# Altium PCB Pedal_Filters_45.PcbDoc (part 1 of 4)
Units mil, origin at the board's own origin, x right, y up, seen from the top; angles counter-clockwise.
Board outline 4875 x 3407.56 mil, 4 copper layers (Top Layer, Layer 1, Layer 2, Bottom Layer); 245 components, 181 nets, 874 pads, 470 vias.
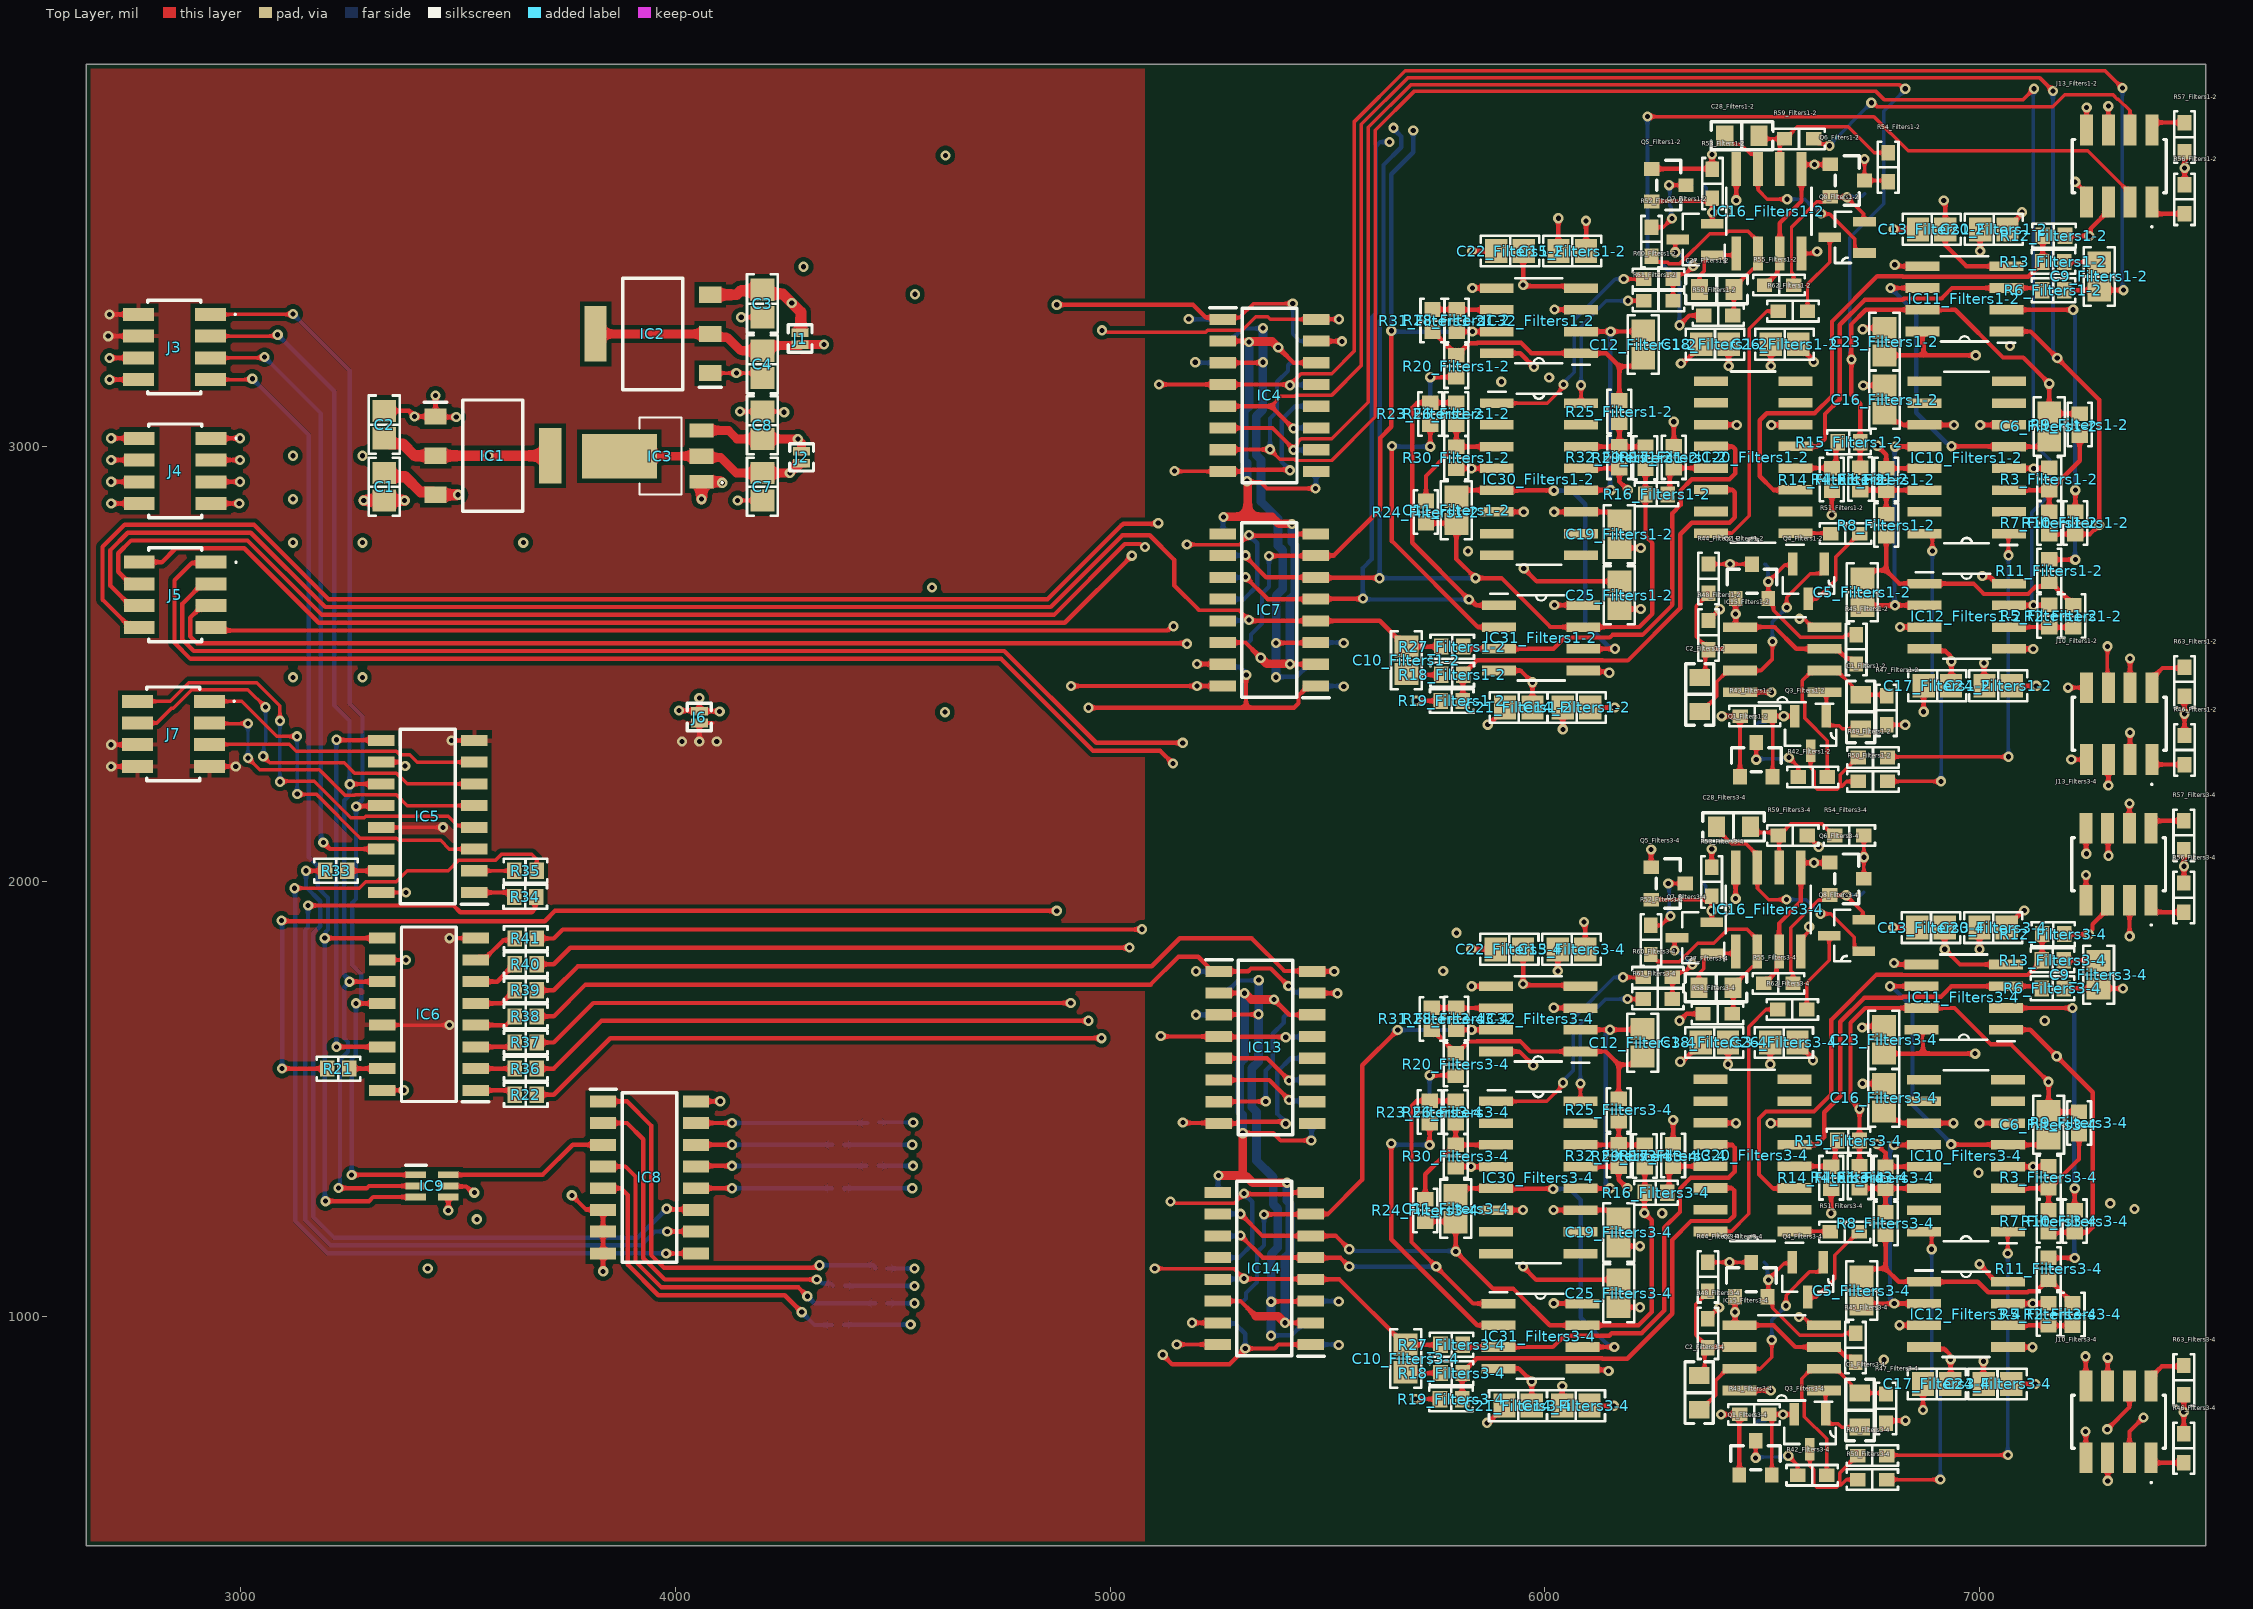
[diagram p0: Top Layer view]
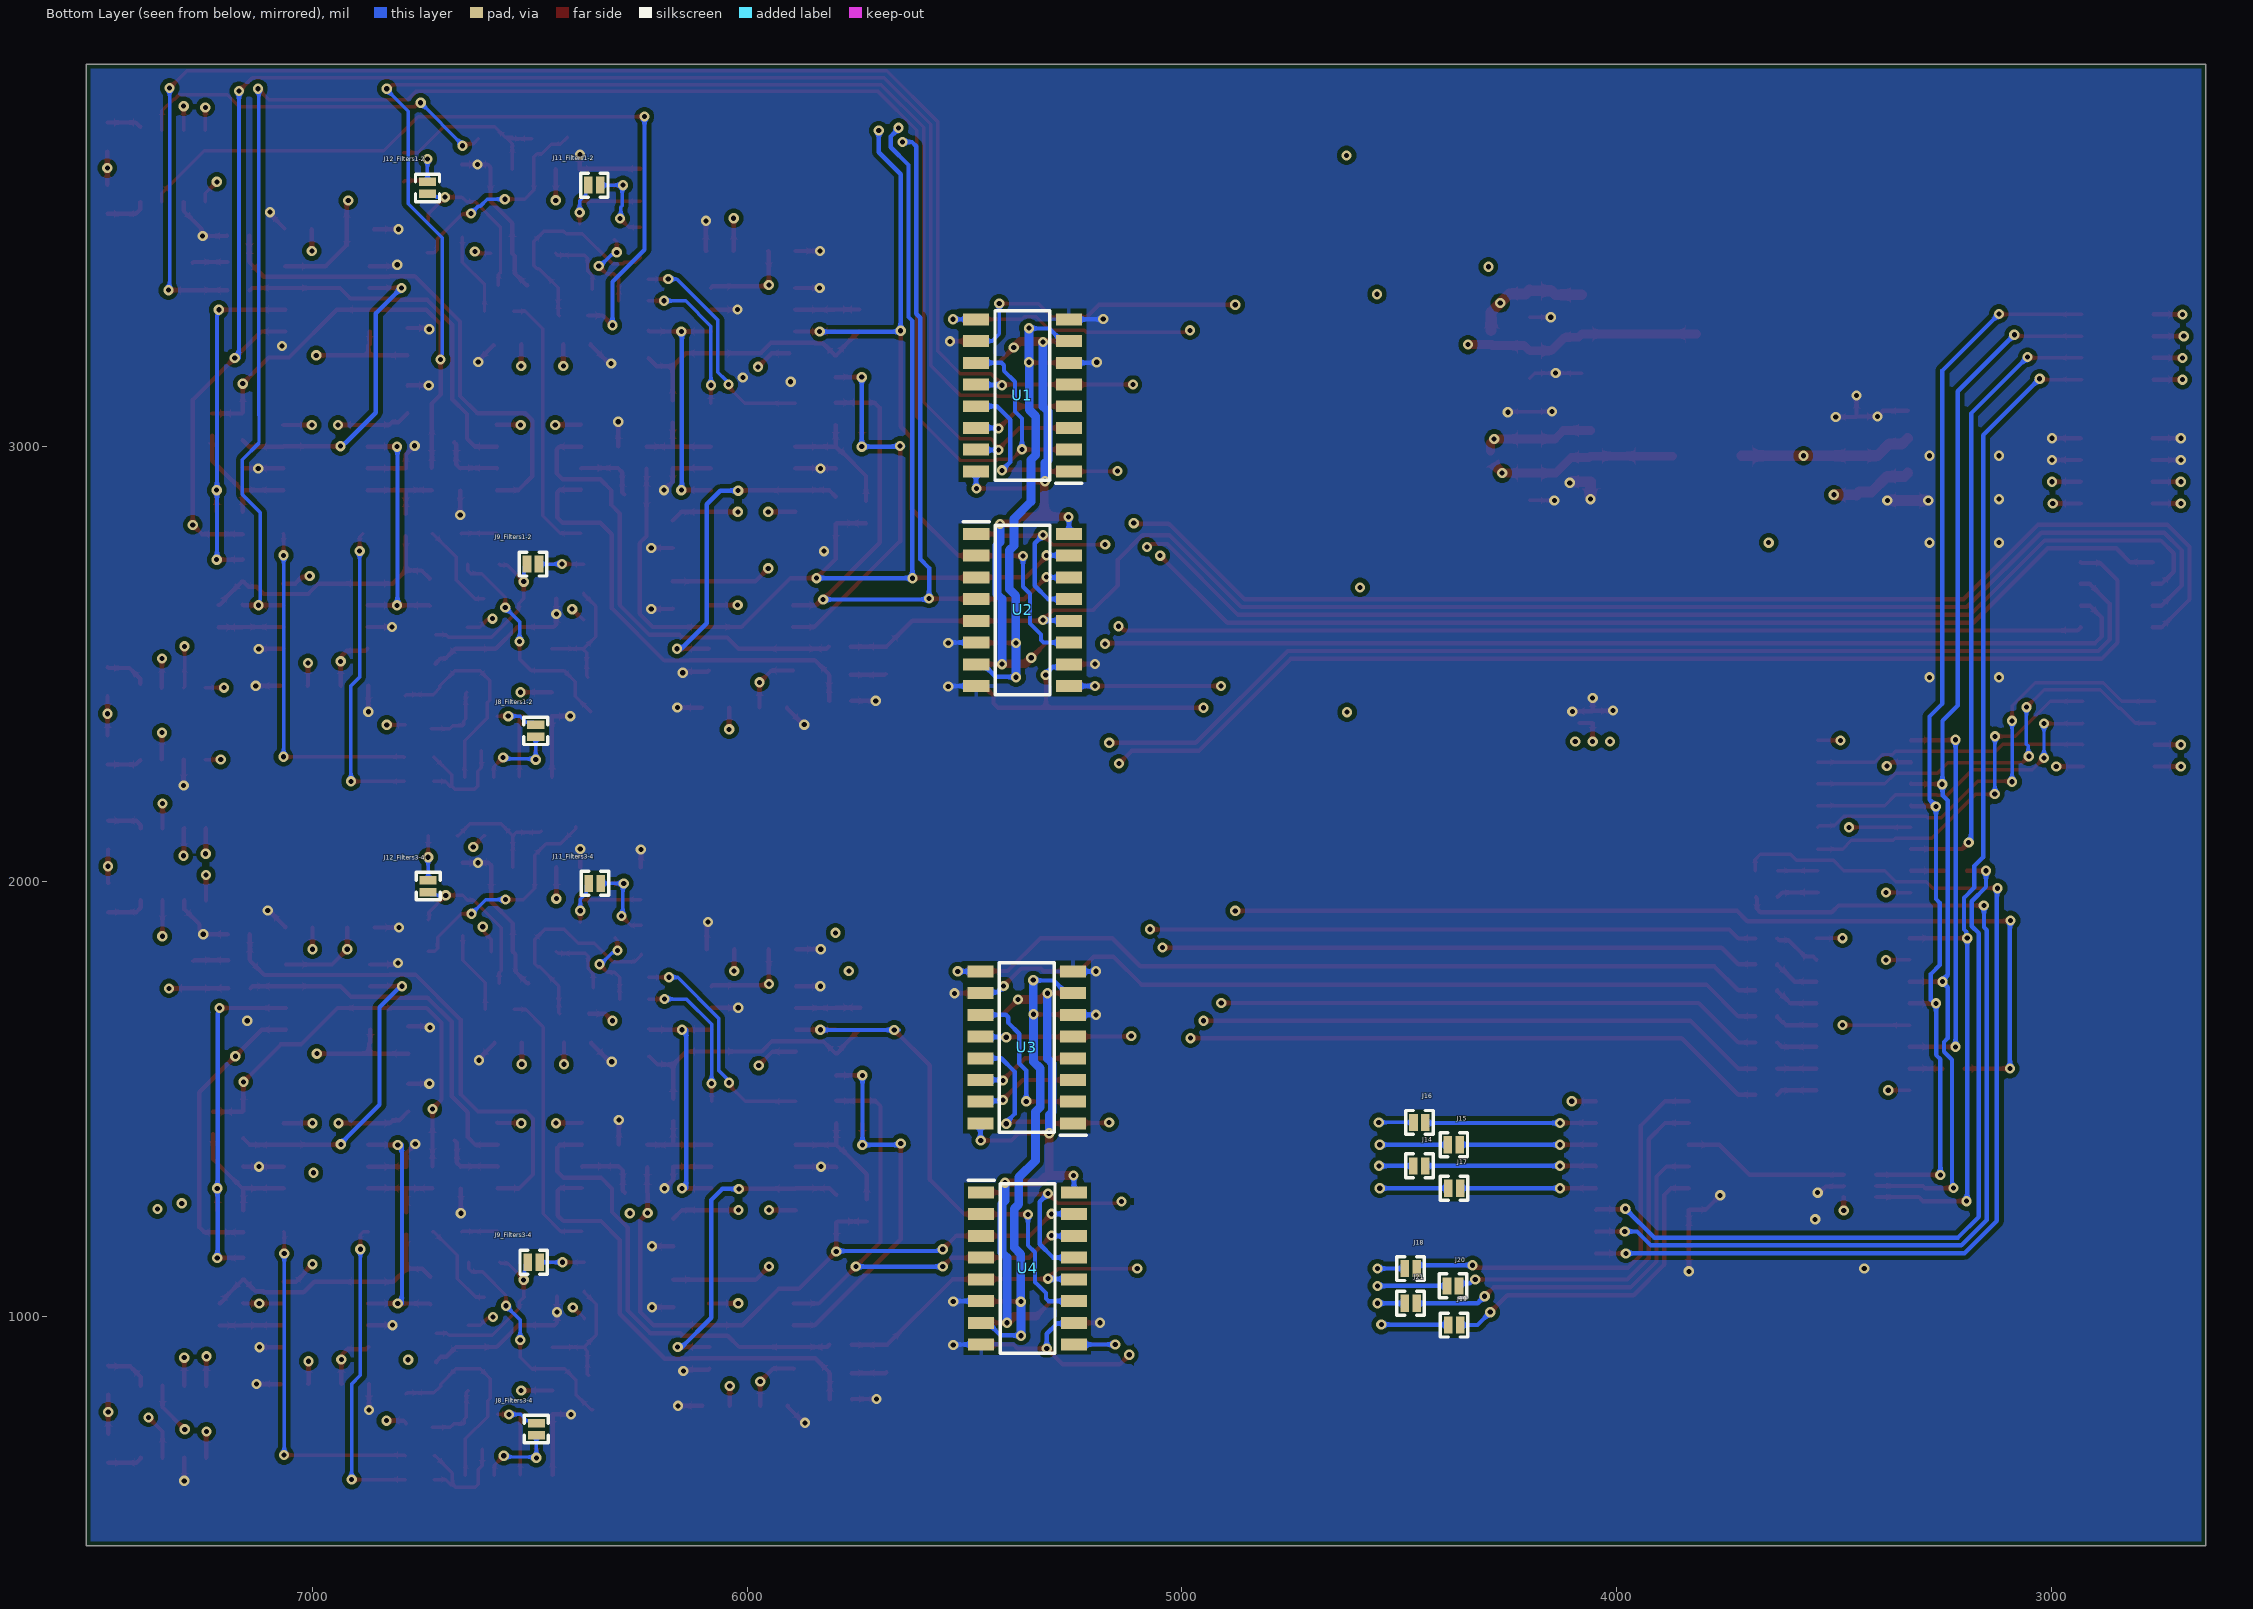
[diagram p1: Bottom Layer view, seen from below]
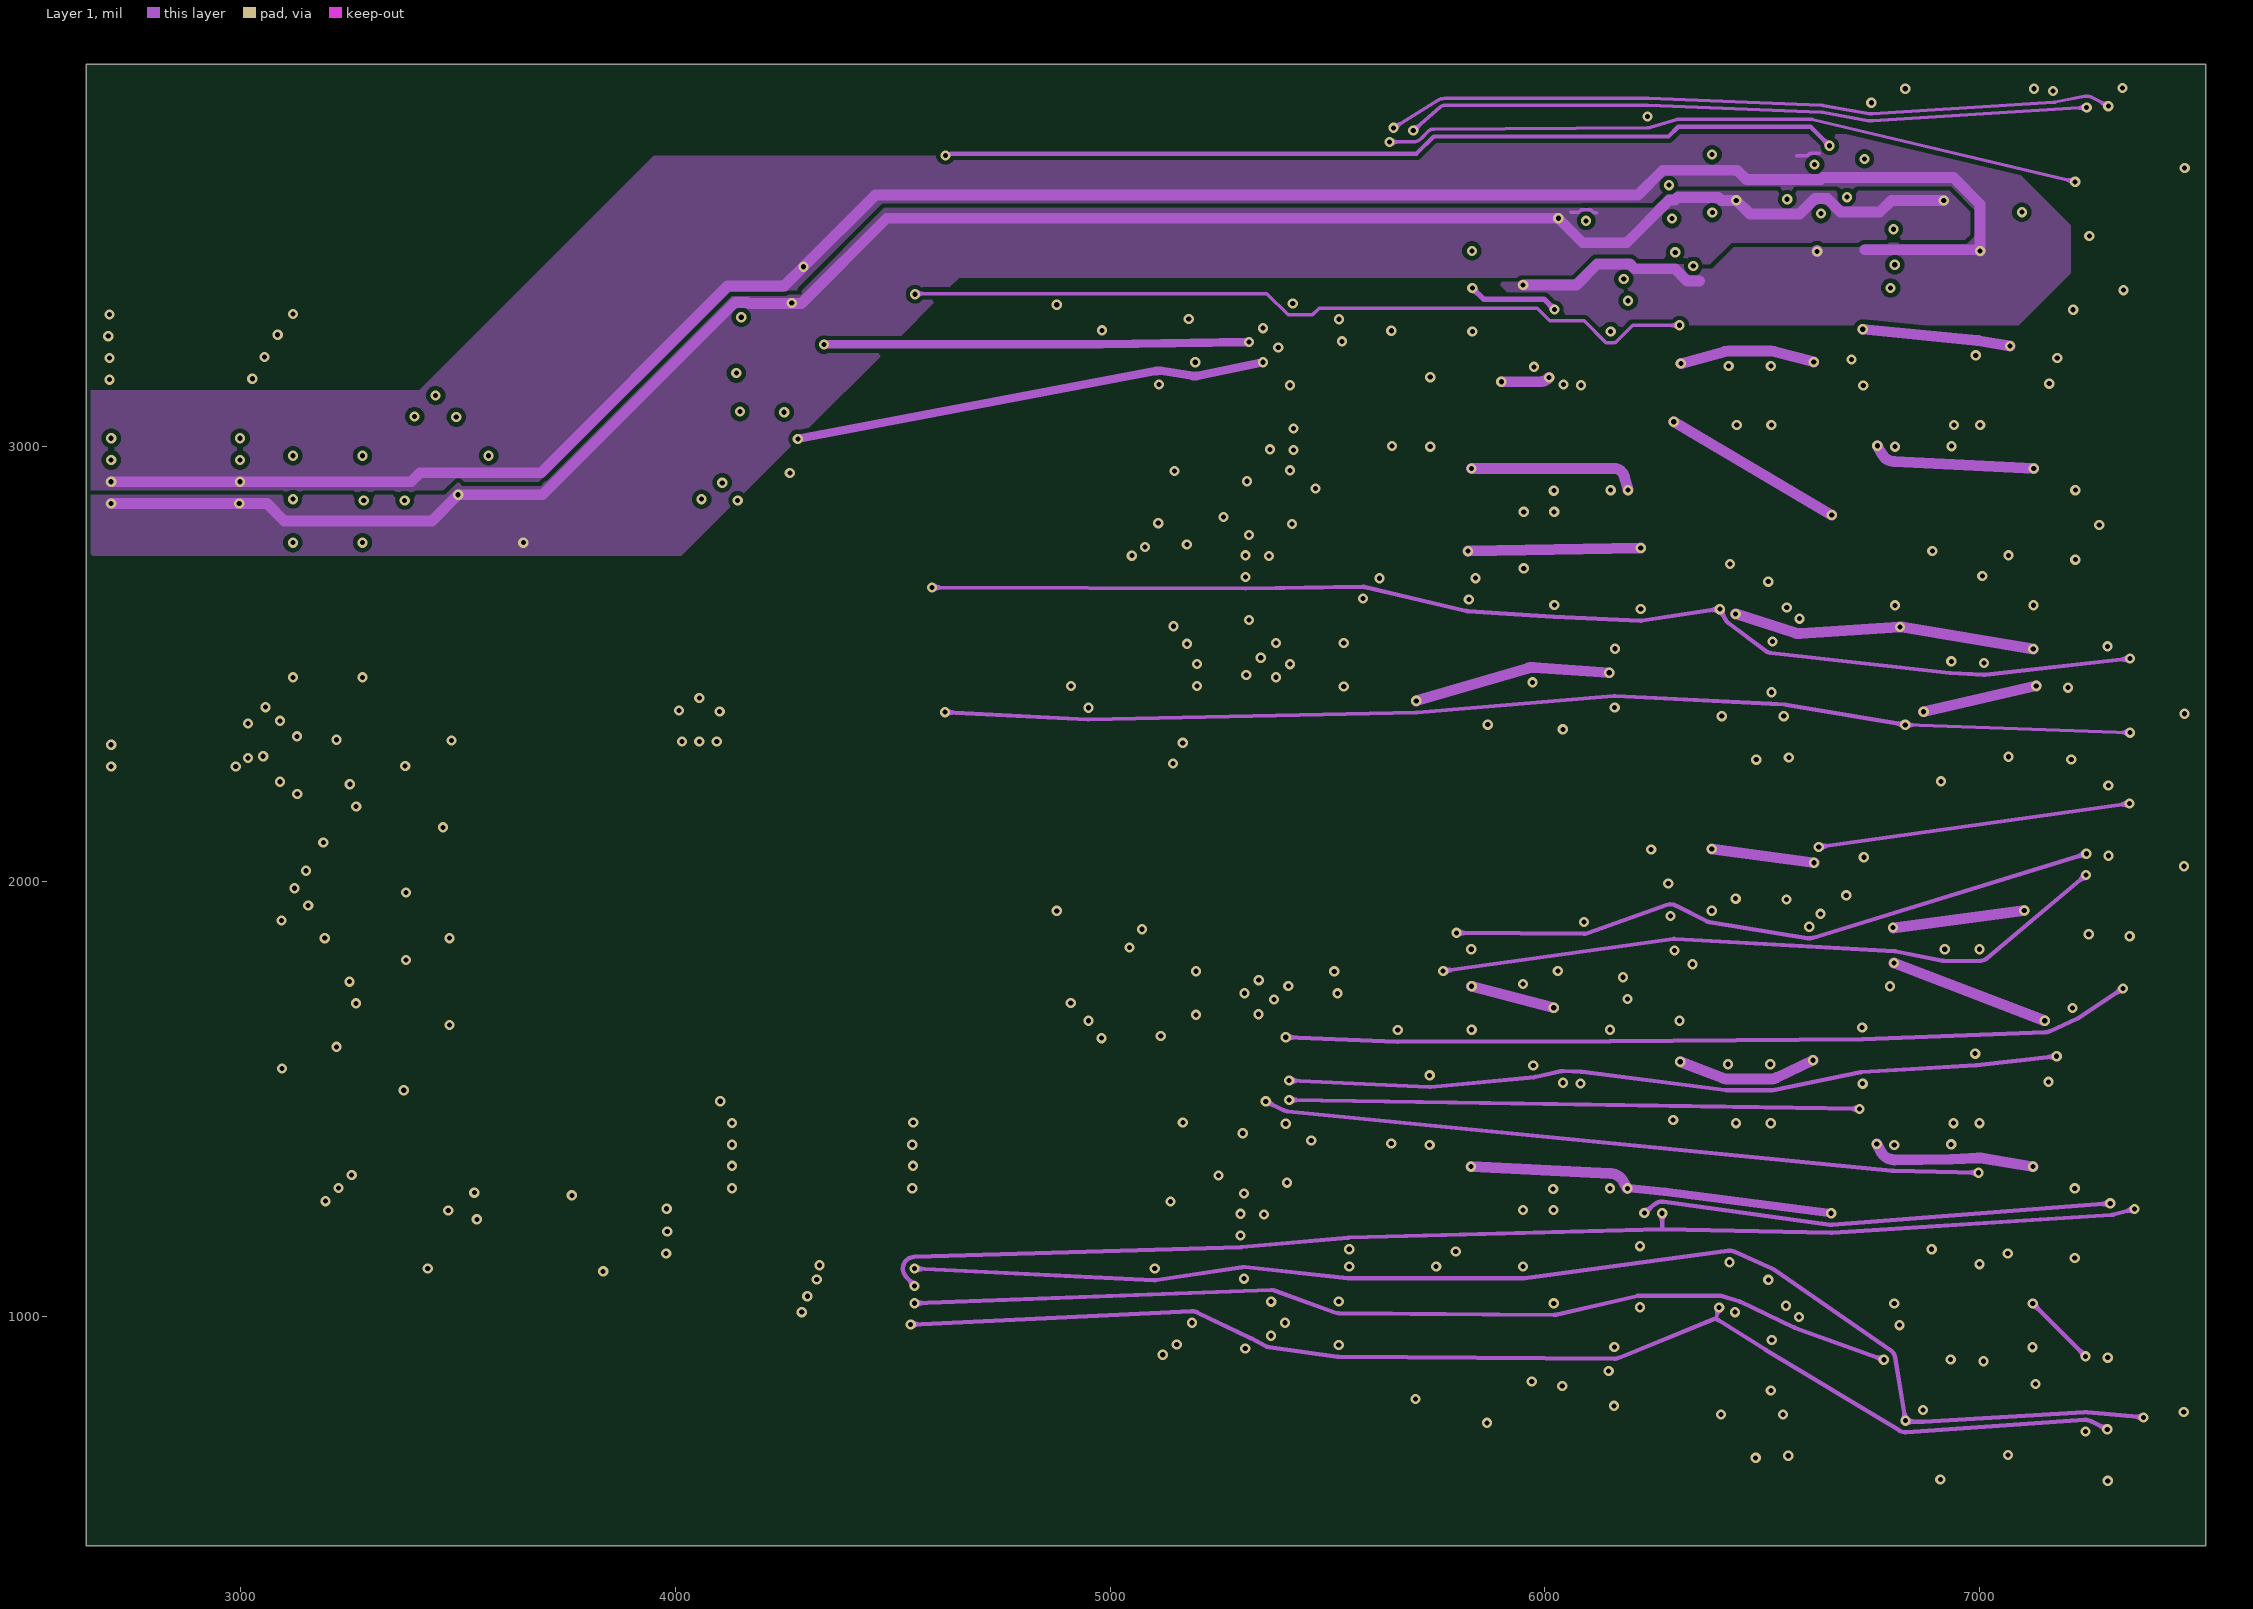
[diagram p2: Layer 1]
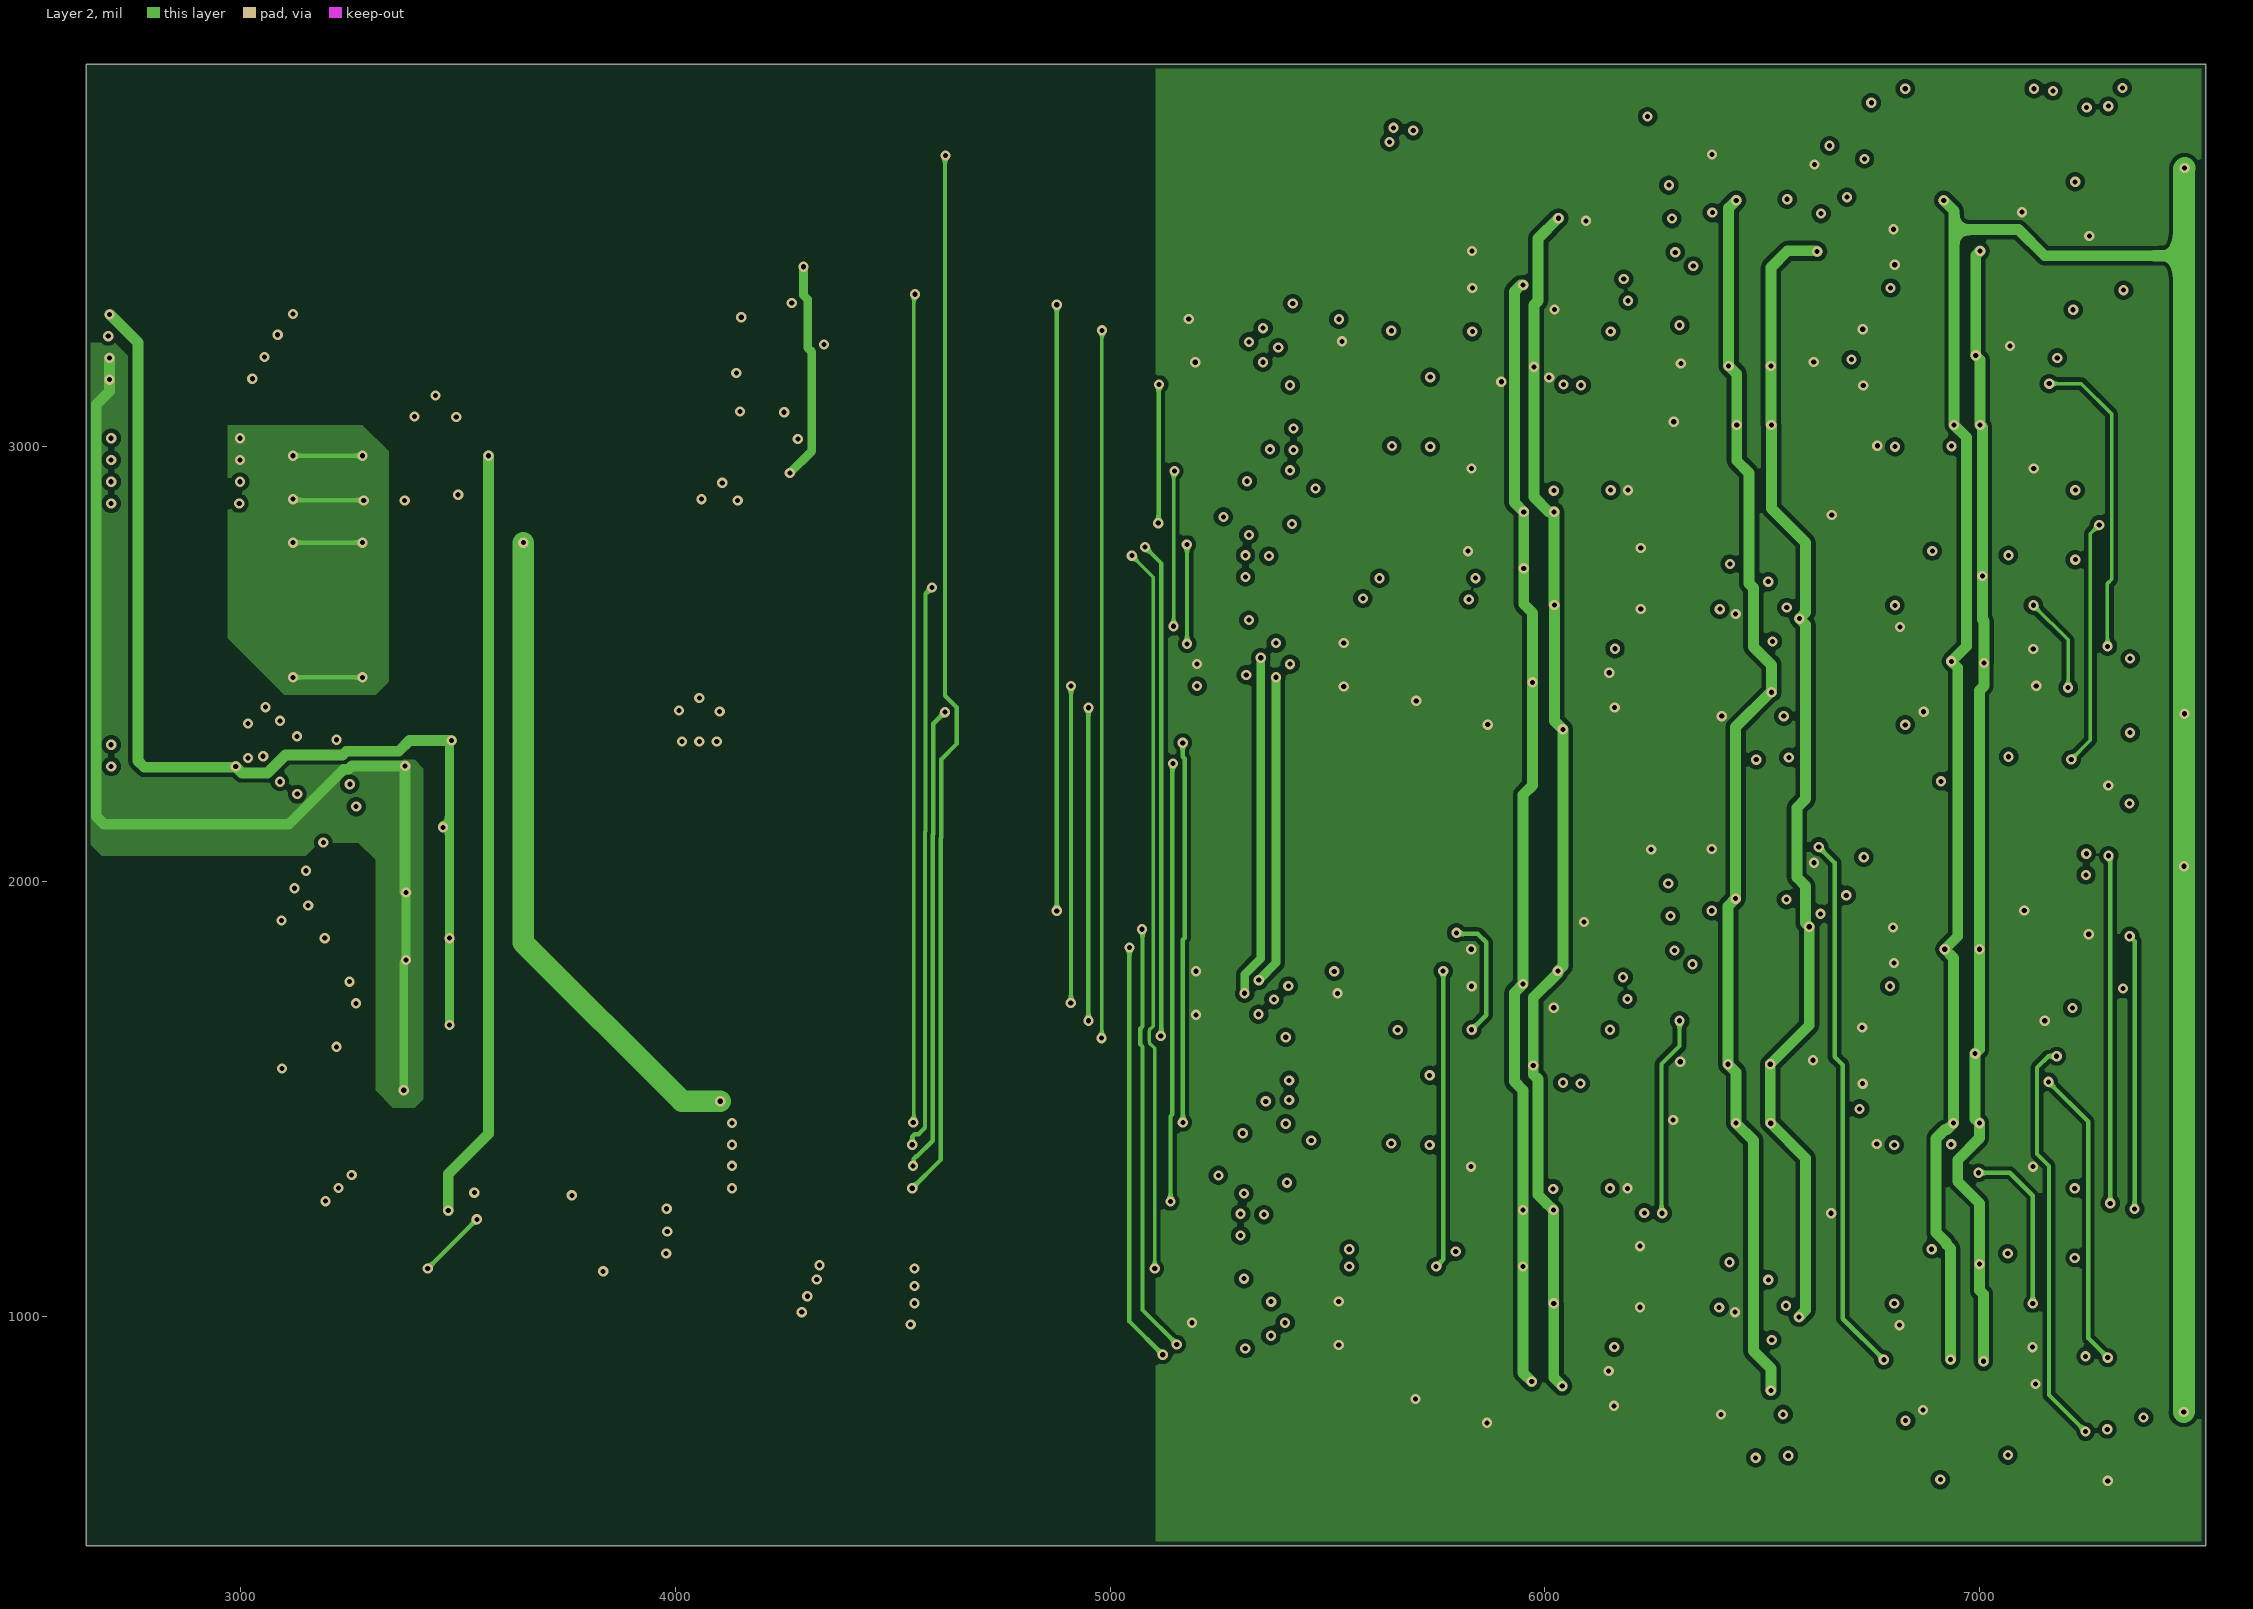
[diagram p3: Layer 2]
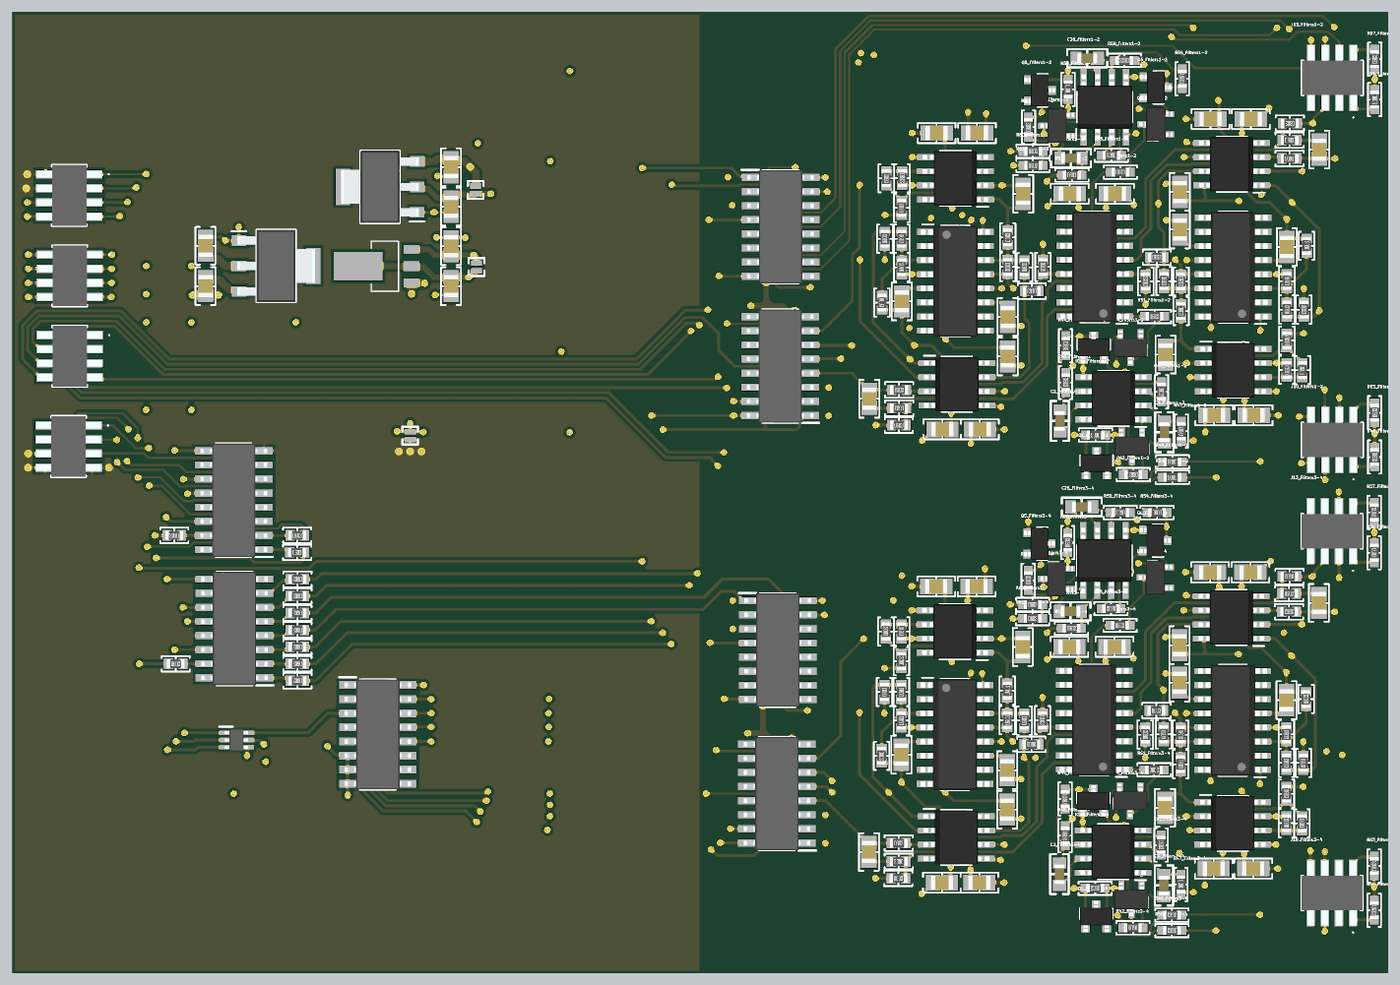
[diagram p6: 3D render of the assembled board from above, using the file's embedded part models]

## Layer stack, top to bottom
Top Solder: solder mask 0.4, Solder Resist, Dk 3.5
Top Layer: signal copper 1.4
Dielectric 2: prepreg 12.6, PP-006, Dk 4.1
Layer 1: signal copper 1.378
Dielectric 1: dielectric 12.6, FR-4, Dk 4.8
Layer 2: signal copper 1.378
Dielectric 3: prepreg 12.6, PP-006, Dk 4.1
Bottom Layer: signal copper 1.4
Bottom Solder: solder mask 0.4, Solder Resist, Dk 3.5

## Board outline
2645,472.44 7520,472.44 7520,3880 2645,3880

## Design rules (kind name [scope] priority, off if disabled: settings)
BoardOutlineClearance [All] p1: gap=10 ignorepadtopadclearanceinfootprint=FALSE except(0: Arc-SplitContinuation Track-SplitContinuation SMDPad-SplitContinuation THPad-SplitContinuation Via-SplitContinuation Fill-SplitContinuation Poly-SplitContinuation Region-SplitContinuation Text-SplitContinuation)
Clearance [All] p1: gap=10 ignorepadtopadclearanceinfootprint=TRUE except(8: Arc-Arc Arc-Track Arc-SMDPad Track-Track Track-SMDPad)
HoleSize [All] p1: absolutevalues=TRUE maxlimit=157.48 minlimit=1 maxpercent=80.000 minpercent=20.000
MinimumSolderMaskSliver [All] p1: minsoldermaskwidth=4
PolygonConnect PolygonConnect_11 [All vs InNet('+5v_DAC')] p1: thpad.connectstyle=Relief thpad.reliefconductorwidth=10 thpad.reliefentries=4 thpad.polygonreliefangle="90 Angle" thpad.airgapwidth=10 smdpad.connectstyle=Relief smdpad.reliefconductorwidth=10 smdpad.reliefentries=4 smdpad.polygonreliefangle="90 Angle" smdpad.airgapwidth=10 via.connectstyle=Direct via.reliefconductorwidth=10 via.reliefentries=4 via.polygonreliefangle="90 Angle" via.airgapwidth=10
PolygonConnect PolygonConnect_10 [All vs InNet('+5')] p2: thpad.connectstyle=Relief thpad.reliefconductorwidth=10 thpad.reliefentries=4 thpad.polygonreliefangle="90 Angle" thpad.airgapwidth=10 smdpad.connectstyle=Relief smdpad.reliefconductorwidth=10 smdpad.reliefentries=4 smdpad.polygonreliefangle="90 Angle" smdpad.airgapwidth=10 via.connectstyle=Direct via.reliefconductorwidth=10 via.reliefentries=4 via.polygonreliefangle="90 Angle" via.airgapwidth=10
PolygonConnect PolygonConnect_9 [All vs InNet('DGND')] p3: thpad.connectstyle=Relief thpad.reliefconductorwidth=10 thpad.reliefentries=4 thpad.polygonreliefangle="90 Angle" thpad.airgapwidth=10 smdpad.connectstyle=Relief smdpad.reliefconductorwidth=10 smdpad.reliefentries=4 smdpad.polygonreliefangle="90 Angle" smdpad.airgapwidth=10 via.connectstyle=Direct via.reliefconductorwidth=10 via.reliefentries=4 via.polygonreliefangle="90 Angle" via.airgapwidth=10
PolygonConnect PolygonConnect_8 [All vs InNet('GND')] p4: thpad.connectstyle=Relief thpad.reliefconductorwidth=10 thpad.reliefentries=4 thpad.polygonreliefangle="90 Angle" thpad.airgapwidth=10 smdpad.connectstyle=Relief smdpad.reliefconductorwidth=10 smdpad.reliefentries=4 smdpad.polygonreliefangle="90 Angle" smdpad.airgapwidth=10 via.connectstyle=Direct via.reliefconductorwidth=10 via.reliefentries=4 via.polygonreliefangle="90 Angle" via.airgapwidth=10
PolygonConnect PolygonConnect_7 [All vs InNet('+12')] p5: thpad.connectstyle=Relief thpad.reliefconductorwidth=10 thpad.reliefentries=4 thpad.polygonreliefangle="90 Angle" thpad.airgapwidth=10 smdpad.connectstyle=Relief smdpad.reliefconductorwidth=10 smdpad.reliefentries=4 smdpad.polygonreliefangle="90 Angle" smdpad.airgapwidth=10 via.connectstyle=Direct via.reliefconductorwidth=10 via.reliefentries=4 via.polygonreliefangle="90 Angle" via.airgapwidth=10
PolygonConnect PolygonConnect_6 [All vs InNet('-12')] p6: thpad.connectstyle=Relief thpad.reliefconductorwidth=10 thpad.reliefentries=4 thpad.polygonreliefangle="90 Angle" thpad.airgapwidth=10 smdpad.connectstyle=Relief smdpad.reliefconductorwidth=10 smdpad.reliefentries=4 smdpad.polygonreliefangle="90 Angle" smdpad.airgapwidth=10 via.connectstyle=Direct via.reliefconductorwidth=10 via.reliefentries=4 via.polygonreliefangle="90 Angle" via.airgapwidth=10
PolygonConnect PolygonConnect_5 [All vs IsNamedPolygon('+V_MUX')] p7: thpad.connectstyle=Relief thpad.reliefconductorwidth=10 thpad.reliefentries=4 thpad.polygonreliefangle="90 Angle" thpad.airgapwidth=10 smdpad.connectstyle=Direct smdpad.reliefconductorwidth=10 smdpad.reliefentries=4 smdpad.polygonreliefangle="90 Angle" smdpad.airgapwidth=10 via.connectstyle=Direct via.reliefconductorwidth=10 via.reliefentries=4 via.polygonreliefangle="90 Angle" via.airgapwidth=10
PolygonConnect PolygonConnect_4 [All vs IsNamedPolygon('-V_MUX')] p8: thpad.connectstyle=Relief thpad.reliefconductorwidth=10 thpad.reliefentries=4 thpad.polygonreliefangle="90 Angle" thpad.airgapwidth=10 smdpad.connectstyle=Direct smdpad.reliefconductorwidth=10 smdpad.reliefentries=4 smdpad.polygonreliefangle="90 Angle" smdpad.airgapwidth=10 via.connectstyle=Direct via.reliefconductorwidth=10 via.reliefentries=4 via.polygonreliefangle="90 Angle" via.airgapwidth=10
PolygonConnect PolygonConnect_3 [All vs IsNamedPolygon('NETD1_1_L01_P003')] p9: thpad.connectstyle=Relief thpad.reliefconductorwidth=10 thpad.reliefentries=4 thpad.polygonreliefangle="90 Angle" thpad.airgapwidth=10 smdpad.connectstyle=Direct smdpad.reliefconductorwidth=10 smdpad.reliefentries=4 smdpad.polygonreliefangle="90 Angle" smdpad.airgapwidth=10 via.connectstyle=Direct via.reliefconductorwidth=10 via.reliefentries=4 via.polygonreliefangle="90 Angle" via.airgapwidth=10
PolygonConnect PolygonConnect_2 [All vs IsNamedPolygon('GND_L01_P005')] p10: thpad.connectstyle=Relief thpad.reliefconductorwidth=10 thpad.reliefentries=4 thpad.polygonreliefangle="90 Angle" thpad.airgapwidth=10 smdpad.connectstyle=Direct smdpad.reliefconductorwidth=10 smdpad.reliefentries=4 smdpad.polygonreliefangle="90 Angle" smdpad.airgapwidth=10 via.connectstyle=Direct via.reliefconductorwidth=10 via.reliefentries=4 via.polygonreliefangle="90 Angle" via.airgapwidth=10
PolygonConnect PolygonConnect_1 [All vs IsNamedPolygon('6V6_L01_P001')] p11: thpad.connectstyle=Relief thpad.reliefconductorwidth=10 thpad.reliefentries=4 thpad.polygonreliefangle="90 Angle" thpad.airgapwidth=10 smdpad.connectstyle=Direct smdpad.reliefconductorwidth=10 smdpad.reliefentries=4 smdpad.polygonreliefangle="90 Angle" smdpad.airgapwidth=10 via.connectstyle=Direct via.reliefconductorwidth=10 via.reliefentries=4 via.polygonreliefangle="90 Angle" via.airgapwidth=10
PolygonConnect [All] p12: connectstyle=Relief reliefconductorwidth=10 reliefentries=4 polygonreliefangle="90 Angle" airgapwidth=10
RoomDefinition Filters3-4 [InComponentClass('Filters3-4')] p1: confinementstyle=ConfineIn formatcopy=TRUE lockcomponents=FALSE outline 5620,596.17 7510,596.17 7510,2185.18 5620,2185.18
RoomDefinition Filters1-2 [InComponentClass('Filters1-2')] p2: confinementstyle=ConfineIn formatcopy=TRUE lockcomponents=FALSE outline 5621.5,2202.52 7511.5,2202.52 7511.5,3791.53 5621.5,3791.53
RoomDefinition Pedal_Filters [InComponentClass('Pedal_Filters')] p3: confinementstyle=ConfineIn formatcopy=TRUE lockcomponents=FALSE outline 0,0 2000,0 2000,1000 0,1000
RoutingVias [All] p1: holewidth=11.81 width=23.62 viastyle="Through Hole" minholewidth=11.81 minwidth=23.62 maxholewidth=11.81 maxwidth=23.62
SolderMaskExpansion [All] p1: expansion=2 istentingtop=FALSE
Width [All] p1: maxlimit=50 minlimit=8 preferedwidth=8
28 further rules are at their usual default settings.

## Classes and differential pairs
channel class 2Filters: Filters1-2 Filters3-4
component class Filters3-4: C1_Filters3-4 C2_Filters3-4 C5_Filters3-4 C6_Filters3-4 C9_Filters3-4 C10_Filters3-4 C11_Filters3-4 C12_Filters3-4 C13_Filters3-4 C14_Filters3-4 C15_Filters3-4 C16_Filters3-4 C17_Filters3-4 C18_Filters3-4 C19_Filters3-4 C20_Filters3-4 C21_Filters3-4 C22_Filters3-4 C23_Filters3-4 C24_Filters3-4 C25_Filters3-4 C26_Filters3-4 C27_Filters3-4 C28_Filters3-4 IC10_Filters3-4 IC11_Filters3-4 IC12_Filters3-4 IC15_Filters3-4 IC16_Filters3-4 IC20_Filters3-4 IC30_Filters3-4 IC31_Filters3-4 IC32_Filters3-4 J8_Filters3-4 J9_Filters3-4 J10_Filters3-4 J11_Filters3-4 J12_Filters3-4 J13_Filters3-4 Q1_Filters3-4 Q2_Filters3-4 Q3_Filters3-4 Q4_Filters3-4 Q5_Filters3-4 Q6_Filters3-4 Q7_Filters3-4 Q8_Filters3-4 R1_Filters3-4 R2_Filters3-4 R3_Filters3-4 R4_Filters3-4 R5_Filters3-4 R6_Filters3-4 R7_Filters3-4 R8_Filters3-4 R9_Filters3-4 R10_Filters3-4 R11_Filters3-4 R12_Filters3-4 R13_Filters3-4 R14_Filters3-4 R15_Filters3-4 R16_Filters3-4 R17_Filters3-4 R18_Filters3-4 R19_Filters3-4 R20_Filters3-4 R23_Filters3-4 R24_Filters3-4 R25_Filters3-4 R26_Filters3-4 R27_Filters3-4 R28_Filters3-4 R29_Filters3-4 R30_Filters3-4 R31_Filters3-4 R32_Filters3-4 R42_Filters3-4 R43_Filters3-4 R44_Filters3-4 R45_Filters3-4 R46_Filters3-4 R47_Filters3-4 R48_Filters3-4 R49_Filters3-4 R50_Filters3-4 R51_Filters3-4 R52_Filters3-4 R53_Filters3-4 R54_Filters3-4 R55_Filters3-4 R56_Filters3-4 R57_Filters3-4 R58_Filters3-4 R59_Filters3-4 R60_Filters3-4 R61_Filters3-4 R62_Filters3-4 R63_Filters3-4
component class Filters1-2: C1_Filters1-2 C2_Filters1-2 C5_Filters1-2 C6_Filters1-2 C9_Filters1-2 C10_Filters1-2 C11_Filters1-2 C12_Filters1-2 C13_Filters1-2 C14_Filters1-2 C15_Filters1-2 C16_Filters1-2 C17_Filters1-2 C18_Filters1-2 C19_Filters1-2 C20_Filters1-2 C21_Filters1-2 C22_Filters1-2 C23_Filters1-2 C24_Filters1-2 C25_Filters1-2 C26_Filters1-2 C27_Filters1-2 C28_Filters1-2 IC10_Filters1-2 IC11_Filters1-2 IC12_Filters1-2 IC15_Filters1-2 IC16_Filters1-2 IC20_Filters1-2 IC30_Filters1-2 IC31_Filters1-2 IC32_Filters1-2 J8_Filters1-2 J9_Filters1-2 J10_Filters1-2 J11_Filters1-2 J12_Filters1-2 J13_Filters1-2 Q1_Filters1-2 Q2_Filters1-2 Q3_Filters1-2 Q4_Filters1-2 Q5_Filters1-2 Q6_Filters1-2 Q7_Filters1-2 Q8_Filters1-2 R1_Filters1-2 R2_Filters1-2 R3_Filters1-2 R4_Filters1-2 R5_Filters1-2 R6_Filters1-2 R7_Filters1-2 R8_Filters1-2 R9_Filters1-2 R10_Filters1-2 R11_Filters1-2 R12_Filters1-2 R13_Filters1-2 R14_Filters1-2 R15_Filters1-2 R16_Filters1-2 R17_Filters1-2 R18_Filters1-2 R19_Filters1-2 R20_Filters1-2 R23_Filters1-2 R24_Filters1-2 R25_Filters1-2 R26_Filters1-2 R27_Filters1-2 R28_Filters1-2 R29_Filters1-2 R30_Filters1-2 R31_Filters1-2 R32_Filters1-2 R42_Filters1-2 R43_Filters1-2 R44_Filters1-2 R45_Filters1-2 R46_Filters1-2 R47_Filters1-2 R48_Filters1-2 R49_Filters1-2 R50_Filters1-2 R51_Filters1-2 R52_Filters1-2 R53_Filters1-2 R54_Filters1-2 R55_Filters1-2 R56_Filters1-2 R57_Filters1-2 R58_Filters1-2 R59_Filters1-2 R60_Filters1-2 R61_Filters1-2 R62_Filters1-2 R63_Filters1-2
component class Pedal_Filters: C1 C2 C3 C4 C7 C8 IC1 IC2 IC3 IC4 IC5 IC6 IC7 IC8 IC9 IC13 IC14 J1 J2 J3 J4 J5 J7 J14 J15 J16 J17 J18 J19 J20 J21 R21 R22 R33 R34 R35 R36 R37 R38 R39 R40 R41 U1 U2 U3 U4

## Components (designator, comment, footprint, x,y, rotation, side; value= is the part's Value field where it differs from the comment)
C1 "=VALUE" "CAP 0805_2012" 3330,2908.5 r90 top
C1_Filters1-2 "10000 pF" "MURATA GRM188 0603_1608" 6726.5,2390.76 r90 top (schematic designator C1)
C1_Filters3-4 "10000 pF" "MURATA GRM188 0603_1608" 6725,784.41 r90 top (schematic designator C1)
C2 "=VALUE" "CAP 0805_2012" 3330,3051.5 r270 top
C2_Filters1-2 "10000 pF" "MURATA GRM188 0603_1608" 6356.5,2430.76 r90 top (schematic designator C2)
C2_Filters3-4 "10000 pF" "MURATA GRM188 0603_1608" 6355,824.41 r90 top (schematic designator C2)
C3 "=VALUE" "CAP 0805_2012" 4200,3330 r270 top
C4 "=VALUE" "CAP 0805_2012" 4200,3190 r90 top
C5_Filters1-2 "Value" "CAP 0805_2012" 6730.5,2665.76 r270 top (schematic designator C5)
C5_Filters3-4 "Value" "CAP 0805_2012" 6729,1059.41 r270 top (schematic designator C5)
C6_Filters1-2 "Value" "CAP 0805_2012" 7160.5,3047.25 r270 top (schematic designator C6)
C6_Filters3-4 "Value" "CAP 0805_2012" 7159,1440.91 r270 top (schematic designator C6)
C7 "=VALUE" "CAP 0805_2012" 4200,2908.5 r270 top
C8 "=VALUE" "CAP 0805_2012" 4200,3050 r90 top
C9_Filters1-2 "Value" "CAP 0805_2012" 7275.5,3392.25 r270 top (schematic designator C9)
C9_Filters3-4 "Value" "CAP 0805_2012" 7274,1785.91 r270 top (schematic designator C9)
C10_Filters1-2 "Value" "CAP 0805_2012" 5681.5,2509.26 r90 top (schematic designator C10)
C10_Filters3-4 "Value" "CAP 0805_2012" 5680,902.91 r90 top (schematic designator C10)
C11_Filters1-2 "Value" "CAP 0805_2012" 5796.5,2854.26 r90 top (schematic designator C11)
C11_Filters3-4 "Value" "CAP 0805_2012" 5795,1247.91 r90 top (schematic designator C11)
C12_Filters1-2 "Value" "CAP 0805_2012" 6226.5,3235.76 r90 top (schematic designator C12)
C12_Filters3-4 "Value" "CAP 0805_2012" 6225,1629.41 r90 top (schematic designator C12)
C13_Filters1-2 "Value" "CAP 0805_2012" 6890,3500.76 r180 top (schematic designator C13)
C13_Filters3-4 "Value" "CAP 0805_2012" 6888.5,1894.41 r180 top (schematic designator C13)
C14_Filters1-2 "Value" "CAP 0805_2012" 6072.99,2400.76 r0 top (schematic designator C14)
C14_Filters3-4 "Value" "CAP 0805_2012" 6071.5,794.41 r0 top (schematic designator C14)
C15_Filters1-2 "Value" "CAP 0805_2012" 6062.99,3450.76 r0 top (schematic designator C15)
C15_Filters3-4 "Value" "CAP 0805_2012" 6061.5,1844.41 r0 top (schematic designator C15)
C16_Filters1-2 "Value" "CAP 0805_2012" 6781.5,3109.26 r90 top (schematic designator C16)
C16_Filters3-4 "Value" "CAP 0805_2012" 6780,1502.91 r90 top (schematic designator C16)
C17_Filters1-2 "Value" "CAP 0805_2012" 6902.99,2450.76 r180 top (schematic designator C17)
C17_Filters3-4 "Value" "CAP 0805_2012" 6901.5,844.41 r180 top (schematic designator C17)
C18_Filters1-2 "Value" "CAP 0805_2012" 6391.5,3236.35 r180 top (schematic designator C18)
C18_Filters3-4 "Value" "CAP 0805_2012" 6390,1630 r180 top (schematic designator C18)
C19_Filters1-2 "Value" "CAP 0805_2012" 6171.5,2799.26 r270 top (schematic designator C19)
C19_Filters3-4 "Value" "CAP 0805_2012" 6170,1192.91 r270 top (schematic designator C19)
C20_Filters1-2 "Value" "CAP 0805_2012" 7032.99,3500.76 r180 top (schematic designator C20)
C20_Filters3-4 "Value" "CAP 0805_2012" 7031.5,1894.41 r180 top (schematic designator C20)
C21_Filters1-2 "Value" "CAP 0805_2012" 5940,2400.76 r0 top (schematic designator C21)
C21_Filters3-4 "Value" "CAP 0805_2012" 5938.5,794.41 r0 top (schematic designator C21)
C22_Filters1-2 "Value" "CAP 0805_2012" 5920,3450.76 r0 top (schematic designator C22)
C22_Filters3-4 "Value" "CAP 0805_2012" 5918.5,1844.41 r0 top (schematic designator C22)
C23_Filters1-2 "Value" "CAP 0805_2012" 6781.5,3242.25 r270 top (schematic designator C23)
C23_Filters3-4 "Value" "CAP 0805_2012" 6780,1635.91 r270 top (schematic designator C23)
C24_Filters1-2 "Value" "CAP 0805_2012" 7042.99,2450.76 r180 top (schematic designator C24)
C24_Filters3-4 "Value" "CAP 0805_2012" 7041.5,844.41 r180 top (schematic designator C24)
C25_Filters1-2 "Value" "CAP 0805_2012" 6171.5,2659.26 r90 top (schematic designator C25)
C25_Filters3-4 "Value" "CAP 0805_2012" 6170,1052.91 r90 top (schematic designator C25)
C26_Filters1-2 "Value" "CAP 0805_2012" 6551.5,3236.35 r180 top (schematic designator C26)
C26_Filters3-4 "Value" "CAP 0805_2012" 6550,1630 r180 top (schematic designator C26)
C27_Filters1-2 "10000 pF" "MURATA GRM188 0603_1608" 6395.5,3362.35 r0 top (schematic designator C27)
C27_Filters3-4 "10000 pF" "MURATA GRM188 0603_1608" 6394,1756 r0 top (schematic designator C27)
C28_Filters1-2 "10000 pF" "MURATA GRM188 0603_1608" 6453.33,3716.04 r0 top (schematic designator C28)
C28_Filters3-4 "10000 pF" "MURATA GRM188 0603_1608" 6434,2126 r0 top (schematic designator C28)
IC1 "AMS1117-5.0" SOT-223 3580,2980 r0 top
IC2 "AMS1117-5.0/AMS1117-6.0" SOT-223 3948.11,3260.16 r180 top
IC3 "79L06/79L05" 79L06 3965.51,2979.06 r90 top
IC4 "DG409MY_PR-T" SOIC127P600X175-16N 5366.85,3118.74 r0 top
IC5 "74HC595D_BJ_" SOIC127P600X175-16N 3430,2150 r180 top
IC6 "74HC595D_BJ_" SOIC127P600X175-16N 3432.72,1695 r180 top
IC7 "DG409MY_PR-T" SOIC127P600X175-16N 5365.86,2625.08 r180 top
IC8 "CD4051BCM" SOIC127P599X175-16N 3940.35,1319.71 r0 top
IC9 "DAC7311IDCKR" SOT65P210X110-6N 3440,1300 r0 top
IC10_Filters1-2 "LM13700N_NOPB" SOIC-16 6970.5,2975.76 r180 top (schematic designator IC10)
IC10_Filters3-4 "LM13700N_NOPB" SOIC-16 6969,1369.41 r180 top (schematic designator IC10)
IC11_Filters1-2 "TL072ACP" SOIC-8 6965.5,3340.76 r180 top (schematic designator IC11)
IC11_Filters3-4 "TL072ACP" SOIC-8 6964,1734.41 r180 top (schematic designator IC11)
IC12_Filters1-2 "TL072ACP" SOIC-8 6970.5,2610.76 r0 top (schematic designator IC12)
IC12_Filters3-4 "TL072ACP" SOIC-8 6969,1004.41 r0 top (schematic designator IC12)
IC13 "DG409MY_PR-T" SOIC127P600X175-16N 5357.37,1618.74 r0 top
IC14 "DG409MY_PR-T" SOIC127P600X175-16N 5354.41,1110.08 r180 top
IC15_Filters1-2 "TL072ACP" SOIC-8 6546.5,2510.76 r180 top (schematic designator IC15)
IC15_Filters3-4 "TL072ACP" SOIC-8 6545,904.41 r180 top (schematic designator IC15)
IC16_Filters1-2 "TL072ACP" SOIC-8 6515.5,3542.35 r90 top (schematic designator IC16)
IC16_Filters3-4 "TL072ACP" SOIC-8 6514,1936 r90 top (schematic designator IC16)
IC20_Filters1-2 "LM13700N_NOPB" SOIC-16 6479.32,2976.58 r180 top (schematic designator IC20)
IC20_Filters3-4 "LM13700N_NOPB" SOIC-16 6477.83,1370.23 r180 top (schematic designator IC20)
IC30_Filters1-2 "LM13700N_NOPB" SOIC-16 5986.5,2925.76 r0 top (schematic designator IC30)
IC30_Filters3-4 "LM13700N_NOPB" SOIC-16 5985,1319.41 r0 top (schematic designator IC30)
IC31_Filters1-2 "TL072ACP" SOIC-8 5991.5,2560.76 r0 top (schematic designator IC31)
IC31_Filters3-4 "TL072ACP" SOIC-8 5990,954.41 r0 top (schematic designator IC31)
IC32_Filters1-2 "TL072ACP" SOIC-8 5986.35,3290.61 r180 top (schematic designator IC32)
IC32_Filters3-4 "TL072ACP" SOIC-8 5984.86,1684.27 r180 top (schematic designator IC32)
J1 "" "CON: JUMPER x1" 4286.59,3235.67 r90 top
J2 "" "CON: JUMPER x1" 4290,2990 r270 top
J3 "LPPB042NFSS-RC" LPPB042NFSSRC 2847.32,3230 r270 top
J4 "LPPB042NFSS-RC" LPPB042NFSSRC 2849.13,2945 r270 top
J5 "LPPB042NFSS-RC" LPPB042NFSSRC 2849.13,2660 r270 top
J6 "" "CON: JUMPER x1" 4055,2365 r90 top
J7 "LPPB042NFSS-RC" LPPB042NFSSRC 2845,2340 r270 top
J8_Filters1-2 "Linear" "CON: JUMPER x1" 6486.5,2333.2 r90 bottom (schematic designator J8)
J8_Filters3-4 "Linear" "CON: JUMPER x1" 6485,726.85 r90 bottom (schematic designator J8)
J9_Filters1-2 "Linear" "CON: JUMPER x1" 6478.94,2730.76 r0 bottom (schematic designator J9)
J9_Filters3-4 "Linear" "CON: JUMPER x1" 6477.44,1124.41 r0 bottom (schematic designator J9)
J10_Filters1-2 "F1 FQ & OUT" LPPB042NFSSRC 7321.5,2363.67 r180 top (schematic designator J10)
J10_Filters3-4 "F1 FQ & OUT" LPPB042NFSSRC 7320,757.32 r180 top (schematic designator J10)
J11_Filters1-2 "Linear" "CON: JUMPER x1" 6337.94,3602.35 r0 bottom (schematic designator J11)
J11_Filters3-4 "Linear" "CON: JUMPER x1" 6336.44,1996 r0 bottom (schematic designator J11)
J12_Filters1-2 "Linear" "CON: JUMPER x1" 6735.5,3609.91 r270 bottom (schematic designator J12)
J12_Filters3-4 "Linear" "CON: JUMPER x1" 6734,2003.56 r270 bottom (schematic designator J12)
J13_Filters1-2 "F2 FQ & OUT" LPPB042NFSSRC 7321.5,3646.35 r180 top (schematic designator J13)
J13_Filters3-4 "F2 FQ & OUT" LPPB042NFSSRC 7320,2040 r180 top (schematic designator J13)
J14 "Linear" "CON: JUMPER x1" 4439.65,1346.24 r0 bottom
J15 "Linear" "CON: JUMPER x1" 4360.63,1394.88 r0 bottom
J16 "Linear" "CON: JUMPER x1" 4439.59,1446.08 r0 bottom
J17 "Linear" "CON: JUMPER x1" 4360,1294.71 r0 bottom
J18 "Linear" "CON: JUMPER x1" 4460,1110 r0 bottom
J19 "Linear" "CON: JUMPER x1" 4360,980 r0 bottom
J20 "Linear" "CON: JUMPER x1" 4362.44,1070 r0 bottom
J21 "Linear" "CON: JUMPER x1" 4460,1030 r0 bottom
Q1_Filters1-2 "MMBT3904-7-F" "DIODES SOT-23-3" 6486.5,2280.76 r90 top (schematic designator Q1)
Q1_Filters3-4 "MMBT3904-7-F" "DIODES SOT-23-3" 6485,674.41 r90 top (schematic designator Q1)
Q2_Filters1-2 "MMBT3904-7-F" "DIODES SOT-23-3" 6476.5,2690.76 r90 top (schematic designator Q2)
Q2_Filters3-4 "MMBT3904-7-F" "DIODES SOT-23-3" 6475,1084.41 r90 top (schematic designator Q2)
Q3_Filters1-2 "3906" SOT-23 6611.5,2340.76 r270 top (schematic designator Q3)
Q3_Filters3-4 "3906" SOT-23 6610,734.41 r270 top (schematic designator Q3)
Q4_Filters1-2 "3906" SOT-23 6606.5,2690.76 r270 top (schematic designator Q4)
Q4_Filters3-4 "3906" SOT-23 6605,1084.41 r270 top (schematic designator Q4)
Q5_Filters1-2 "MMBT3904-7-F" "DIODES SOT-23-3" 6285.5,3602.35 r0 top (schematic designator Q5)
Q5_Filters3-4 "MMBT3904-7-F" "DIODES SOT-23-3" 6284,1996 r0 top (schematic designator Q5)
Q6_Filters1-2 "MMBT3904-7-F" "DIODES SOT-23-3" 6696.13,3612.98 r0 top (schematic designator Q6)
Q6_Filters3-4 "MMBT3904-7-F" "DIODES SOT-23-3" 6694.63,2006.63 r0 top (schematic designator Q6)
Q7_Filters1-2 "3906" SOT-23 6345.5,3477.35 r180 top (schematic designator Q7)
Q7_Filters3-4 "3906" SOT-23 6344,1871 r180 top (schematic designator Q7)
Q8_Filters1-2 "3906" SOT-23 6695.5,3482.35 r180 top (schematic designator Q8)
Q8_Filters3-4 "3906" SOT-23 6694,1876 r180 top (schematic designator Q8)
R1_Filters1-2 "220 Ohms" "RES 0603_1608" 6785.5,2925.17 r270 top (schematic designator R1)
R1_Filters3-4 "220 Ohms" "RES 0603_1608" 6784,1318.82 r270 top (schematic designator R1)
R2_Filters1-2 "100 kOhms" "RES 0603_1608" 7215.5,2610.76 r270 top (schematic designator R2)
R2_Filters3-4 "100 kOhms" "RES 0603_1608" 7214,1004.41 r270 top (schematic designator R2)
R3_Filters1-2 "220 Ohms" "RES 0603_1608" 7160.5,2926.35 r270 top (schematic designator R3)
R3_Filters3-4 "220 Ohms" "RES 0603_1608" 7159,1320 r270 top (schematic designator R3)
R4_Filters1-2 "10 kOhms" "RES 0603_1608" 6725.5,2926.35 r270 top (schematic designator R4)
R4_Filters3-4 "10 kOhms" "RES 0603_1608" 6724,1320 r270 top (schematic designator R4)
R5_Filters1-2 "47 kOhms" "RES 0603_1608" 7160.5,2611.35 r90 top (schematic designator R5)
R5_Filters3-4 "47 kOhms" "RES 0603_1608" 7159,1005 r90 top (schematic designator R5)
R6_Filters1-2 "47 kOhms" "RES 0603_1608" 7169.91,3360.76 r180 top (schematic designator R6)
R6_Filters3-4 "47 kOhms" "RES 0603_1608" 7168.41,1754.41 r180 top (schematic designator R6)
R7_Filters1-2 "10 kOhms" "RES 0603_1608" 7160.5,2825.17 r90 top (schematic designator R7)
R7_Filters3-4 "10 kOhms" "RES 0603_1608" 7159,1218.82 r90 top (schematic designator R7)
R8_Filters1-2 "10 kOhms" "RES 0603_1608" 6785.5,2820.17 r270 top (schematic designator R8)
R8_Filters3-4 "10 kOhms" "RES 0603_1608" 6784,1213.82 r270 top (schematic designator R8)
R9_Filters1-2 "10 kOhms" "RES 0603_1608" 7230.5,3051.35 r90 top (schematic designator R9)
R9_Filters3-4 "10 kOhms" "RES 0603_1608" 7229,1445 r90 top (schematic designator R9)
R10_Filters1-2 "100 kOhms" "RES 0603_1608" 7220.5,2825.17 r270 top (schematic designator R10)
R10_Filters3-4 "100 kOhms" "RES 0603_1608" 7219,1218.82 r270 top (schematic designator R10)
R11_Filters1-2 "100 kOhms" "RES 0603_1608" 7160.5,2715.76 r270 top (schematic designator R11)
R11_Filters3-4 "100 kOhms" "RES 0603_1608" 7159,1109.41 r270 top (schematic designator R11)
R12_Filters1-2 "220 Ohms" "RES 0603_1608" 7171.09,3485.76 r180 top (schematic designator R12)
R12_Filters3-4 "220 Ohms" "RES 0603_1608" 7169.59,1879.41 r180 top (schematic designator R12)
R13_Filters1-2 "10 kOhms" "RES 0603_1608" 7169.91,3425.76 r0 top (schematic designator R13)
R13_Filters3-4 "10 kOhms" "RES 0603_1608" 7168.41,1819.41 r0 top (schematic designator R13)
R14_Filters1-2 "220 Ohms" "RES 0603_1608" 6660.5,2925.17 r90 top (schematic designator R14)
R14_Filters3-4 "220 Ohms" "RES 0603_1608" 6659,1318.82 r90 top (schematic designator R14)
R15_Filters1-2 "10 kOhms" "RES 0603_1608" 6699.91,3010.76 r0 top (schematic designator R15)
R15_Filters3-4 "10 kOhms" "RES 0603_1608" 6698.41,1404.41 r0 top (schematic designator R15)
R16_Filters1-2 "10 kOhms" "RES 0603_1608" 6257.09,2890.76 r180 top (schematic designator R16)
R16_Filters3-4 "10 kOhms" "RES 0603_1608" 6255.59,1284.41 r180 top (schematic designator R16)
R17_Filters1-2 "220 Ohms" "RES 0603_1608" 6296.5,2976.35 r270 top (schematic designator R17)
R17_Filters3-4 "220 Ohms" "RES 0603_1608" 6295,1370 r270 top (schematic designator R17)
R18_Filters1-2 "10 kOhms" "RES 0603_1608" 5787.09,2475.76 r180 top (schematic designator R18)
R18_Filters3-4 "10 kOhms" "RES 0603_1608" 5785.59,869.41 r180 top (schematic designator R18)
R19_Filters1-2 "220 Ohms" "RES 0603_1608" 5785.91,2415.76 r0 top (schematic designator R19)
R19_Filters3-4 "220 Ohms" "RES 0603_1608" 5784.41,809.41 r0 top (schematic designator R19)
R20_Filters1-2 "100 kOhms" "RES 0603_1608" 5796.5,3185.76 r90 top (schematic designator R20)
R20_Filters3-4 "100 kOhms" "RES 0603_1608" 5795,1579.41 r90 top (schematic designator R20)
R21 "220 Ohms" "RES 0603_1608" 3224.41,1570 r0 top
R22 "220 Ohms" "RES 0603_1608" 3655.59,1510 r180 top
R23_Filters1-2 "100 kOhms" "RES 0603_1608" 5736.5,3076.35 r90 top (schematic designator R23)
R23_Filters3-4 "100 kOhms" "RES 0603_1608" 5735,1470 r90 top (schematic designator R23)
R24_Filters1-2 "10 kOhms" "RES 0603_1608" 5726.5,2850.17 r270 top (schematic designator R24)
R24_Filters3-4 "10 kOhms" "RES 0603_1608" 5725,1243.82 r270 top (schematic designator R24)
R25_Filters1-2 "10 kOhms" "RES 0603_1608" 6171.5,3081.35 r90 top (schematic designator R25)
R25_Filters3-4 "10 kOhms" "RES 0603_1608" 6170,1475 r90 top (schematic designator R25)
R26_Filters1-2 "10 kOhms" "RES 0603_1608" 5796.5,3076.35 r270 top (schematic designator R26)
R26_Filters3-4 "10 kOhms" "RES 0603_1608" 5795,1470 r270 top (schematic designator R26)
R27_Filters1-2 "47 kOhms" "RES 0603_1608" 5787.09,2540.76 r0 top (schematic designator R27)
R27_Filters3-4 "47 kOhms" "RES 0603_1608" 5785.59,934.41 r0 top (schematic designator R27)
R28_Filters1-2 "47 kOhms" "RES 0603_1608" 5797.53,3291.21 r270 top (schematic designator R28)
R28_Filters3-4 "47 kOhms" "RES 0603_1608" 5796.04,1684.86 r270 top (schematic designator R28)
R29_Filters1-2 "10 kOhms" "RES 0603_1608" 6231.5,2975.17 r90 top (schematic designator R29)
R29_Filters3-4 "10 kOhms" "RES 0603_1608" 6230,1368.82 r90 top (schematic designator R29)
R30_Filters1-2 "220 Ohms" "RES 0603_1608" 5796.5,2975.17 r90 top (schematic designator R30)
R30_Filters3-4 "220 Ohms" "RES 0603_1608" 5795,1368.82 r90 top (schematic designator R30)
R31_Filters1-2 "100 kOhms" "RES 0603_1608" 5741.5,3290.76 r90 top (schematic designator R31)
R31_Filters3-4 "100 kOhms" "RES 0603_1608" 5740,1684.41 r90 top (schematic designator R31)
R32_Filters1-2 "220 Ohms" "RES 0603_1608" 6171.5,2976.35 r90 top (schematic designator R32)
R32_Filters3-4 "220 Ohms" "RES 0603_1608" 6170,1370 r90 top (schematic designator R32)
R33 "220 Ohms" "RES 0603_1608" 3219.41,2025 r180 top
R34 "220 Ohms" "RES 0603_1608" 3654.41,1965 r0 top
R35 "220 Ohms" "RES 0603_1608" 3655,2025 r0 top
R36 "220 Ohms" "RES 0603_1608" 3655.59,1570 r180 top
R37 "220 Ohms" "RES 0603_1608" 3655.59,1630 r180 top
R38 "220 Ohms" "RES 0603_1608" 3655.59,1690 r180 top
R39 "220 Ohms" "RES 0603_1608" 3655.59,1750 r180 top
R40 "220 Ohms" "RES 0603_1608" 3655.59,1810 r180 top
R41 "220 Ohms" "RES 0603_1608" 3655.59,1869.41 r180 top
R42_Filters1-2 "33 kOhms" "YAGEO RES 0603_1608" 6616.5,2240.76 r180 top (schematic designator R42)
R42_Filters3-4 "33 kOhms" "YAGEO RES 0603_1608" 6615,634.41 r180 top (schematic designator R42)
R43_Filters1-2 "1 kOhms" "YAGEO RES 0603_1608" 6483.03,2380.76 r180 top (schematic designator R43)
R43_Filters3-4 "1 kOhms" "YAGEO RES 0603_1608" 6481.54,774.41 r180 top (schematic designator R43)
R44_Filters1-2 "33 kOhms" "YAGEO RES 0603_1608" 6376.5,2697.29 r90 top (schematic designator R44)
R44_Filters3-4 "33 kOhms" "YAGEO RES 0603_1608" 6375,1090.94 r90 top (schematic designator R44)
R45_Filters1-2 "1 kOhms" "YAGEO RES 0603_1608" 6716.5,2534.22 r270 top (schematic designator R45)
R45_Filters3-4 "1 kOhms" "YAGEO RES 0603_1608" 6715,927.87 r270 top (schematic designator R45)
R46_Filters1-2 "120 kOhms" "YAGEO RES 0603_1608" 7471.5,2302.88 r270 top (schematic designator R46)
R46_Filters3-4 "120 kOhms" "YAGEO RES 0603_1608" 7470,696.54 r270 top (schematic designator R46)
R47_Filters1-2 "330 kOhms" "YAGEO RES 0603_1608" 6786.5,2394.22 r90 top (schematic designator R47)
R47_Filters3-4 "330 kOhms" "YAGEO RES 0603_1608" 6785,787.87 r90 top (schematic designator R47)
R48_Filters1-2 "330 kOhms" "YAGEO RES 0603_1608" 6376.5,2567.29 r270 top (schematic designator R48)
R48_Filters3-4 "330 kOhms" "YAGEO RES 0603_1608" 6375,960.94 r270 top (schematic designator R48)
R49_Filters1-2 "6.8 kOhms" "YAGEO RES 0603_1608" 6754.96,2285.76 r180 top (schematic designator R49)
R49_Filters3-4 "6.8 kOhms" "YAGEO RES 0603_1608" 6753.46,679.41 r180 top (schematic designator R49)
R50_Filters1-2 "6.8 kOhms" "YAGEO RES 0603_1608" 6754.96,2230.76 r180 top (schematic designator R50)
R50_Filters3-4 "6.8 kOhms" "YAGEO RES 0603_1608" 6753.46,624.41 r180 top (schematic designator R50)
R51_Filters1-2 "6.8 kOhms" "YAGEO RES 0603_1608" 6691.5,2800.76 r0 top (schematic designator R51)
R51_Filters3-4 "6.8 kOhms" "YAGEO RES 0603_1608" 6690,1194.41 r0 top (schematic designator R51)
R52_Filters1-2 "33 kOhms" "YAGEO RES 0603_1608" 6245.5,3472.35 r90 top (schematic designator R52)
R52_Filters3-4 "33 kOhms" "YAGEO RES 0603_1608" 6244,1866 r90 top (schematic designator R52)
R53_Filters1-2 "1 kOhms" "YAGEO RES 0603_1608" 6385.5,3605.81 r90 top (schematic designator R53)
R53_Filters3-4 "1 kOhms" "YAGEO RES 0603_1608" 6384,1999.46 r90 top (schematic designator R53)
R54_Filters1-2 "33 kOhms" "YAGEO RES 0603_1608" 6790,3643.46 r270 top (schematic designator R54)
R54_Filters3-4 "33 kOhms" "YAGEO RES 0603_1608" 6700.54,2106 r0 top (schematic designator R54)
R55_Filters1-2 "1 kOhms" "YAGEO RES 0603_1608" 6538.96,3372.35 r180 top (schematic designator R55)
R55_Filters3-4 "1 kOhms" "YAGEO RES 0603_1608" 6537.46,1766 r180 top (schematic designator R55)
R56_Filters1-2 "120 kOhms" "YAGEO RES 0603_1608" 7471.5,3569.81 r270 top (schematic designator R56)
R56_Filters3-4 "120 kOhms" "YAGEO RES 0603_1608" 7470,1963.46 r270 top (schematic designator R56)
R57_Filters1-2 "120 kOhms" "YAGEO RES 0603_1608" 7471.5,3712.88 r90 top (schematic designator R57)
R57_Filters3-4 "120 kOhms" "YAGEO RES 0603_1608" 7470,2106.54 r90 top (schematic designator R57)
R58_Filters1-2 "330 kOhms" "YAGEO RES 0603_1608" 6398.96,3302.35 r0 top (schematic designator R58)
R58_Filters3-4 "330 kOhms" "YAGEO RES 0603_1608" 6397.46,1696 r0 top (schematic designator R58)
R59_Filters1-2 "330 kOhms" "YAGEO RES 0603_1608" 6584.8,3708.92 r180 top (schematic designator R59)
R59_Filters3-4 "330 kOhms" "YAGEO RES 0603_1608" 6570.54,2106 r180 top (schematic designator R59)
R60_Filters1-2 "6.8 kOhms" "YAGEO RES 0603_1608" 6261.5,3386.35 r0 top (schematic designator R60)
R60_Filters3-4 "6.8 kOhms" "YAGEO RES 0603_1608" 6260,1780 r0 top (schematic designator R60)
R61_Filters1-2 "6.8 kOhms" "YAGEO RES 0603_1608" 6261.5,3336.35 r0 top (schematic designator R61)
R61_Filters3-4 "6.8 kOhms" "YAGEO RES 0603_1608" 6260,1730 r0 top (schematic designator R61)
R62_Filters1-2 "6.8 kOhms" "YAGEO RES 0603_1608" 6570.85,3312.39 r0 top (schematic designator R62)
R62_Filters3-4 "6.8 kOhms" "YAGEO RES 0603_1608" 6569.36,1706.04 r0 top (schematic designator R62)
R63_Filters1-2 "120 kOhms" "YAGEO RES 0603_1608" 7471.5,2459.81 r90 top (schematic designator R63)
R63_Filters3-4 "120 kOhms" "YAGEO RES 0603_1608" 7470,853.46 r90 top (schematic designator R63)
U1 "CD4052BCM" SOIC127P599X175-16N 5366.85,3118.74 r0 bottom
U2 "CD4052BCM" SOIC127P599X175-16N 5366.37,2625.08 r180 bottom
U3 "CD4052BCM" SOIC127P599X175-16N 5356.85,1618.74 r0 bottom
U4 "CD4052BCM" SOIC127P599X175-16N 5354.92,1110.08 r180 bottom

## Footprints (in the part's own frame and the unit in brackets; to place one, negate y for a bottom-side part, rotate by r counter-clockwise, add the part's x,y. Pads: shape width x height; smd on the part's side, far side on the other; paste and mask are expansions set on the pad)
79L06 [mm]
  rect 0.8x1.4 smd: 1(-1.5,-2.4) 3(1.5,-2.4)
  rect 0.9x1.4 smd: 2(0,-2.4)
  rect 2.6x4.4 smd: 4(0,2.4)
  silkscreen extent -2.25,-3.65 2.25,1.22
"CAP 0805_2012" [mm] "Chip Capacitor, 2-Leads, Body 2.00x1.20mm, IPC Medium Density"
  rect 1.3x1.4 smd: 1(-0.8,0) 2(0.8,0)
  silkscreen extent -1.7,-0.9 1.7,0.9, body extent -1,-0.64 1,0.64, height 1.26
"CON: JUMPER x1" [mm]
  rect 0.5x1 smd: 1(0,0) 2(0.7,0)
  silkscreen extent -0.45,-0.7 1.15,0.7
"DIODES SOT-23-3" [mm] "SOT23, 3-Leads, Body 2.90x2.40mm, Pitch 0.95mm, IPC Medium Density"
  rect 0.9x0.8 smd: 1(-1,0.95) 2(-1,-0.95) 3(1,0)
  silkscreen extent -0.7,-1.45 0.7,1.45, body extent -1.41,-1.45 1.41,1.45, height 1.5
LPPB042NFSSRC [mm]
  rect 0.76x1.8 smd: 1(-1.905,2.1) 2(-1.905,-2.1) 3(-0.635,2.1) 4(-0.635,-2.1) 5(0.635,2.1) 6(0.635,-2.1) 7(1.905,2.1) 8(1.905,-2.1)
  silkscreen extent -2.74,-1.55 2.74,3.6, body extent -2.74,-2.92 2.74,2.92, height 4.75
"MURATA GRM188 0603_1608" [mm] "Chip Capacitor, 2-Leads, Body 1.60x0.80mm"
  rect 1x1.2 smd: 1(-1,0) 2(1,0)
  silkscreen extent -1.8,-0.83 1.8,0.83, body extent -0.9,-0.5 0.9,0.5, height 1
"RES 0603_1608" [mm] "Chip Resistor, 2-Leads, Body 1.60x0.80mm, IPC Medium Density"
  rect 0.85x0.95 smd: 1(-0.65,0) 2(0.65,0)
  silkscreen extent -1.27,-0.7 1.27,0.7, body extent -0.8,-0.4 0.8,0.4, height 0.45
SOIC127P599X175-16N [mm]
  rect 1.526x0.7 smd: 1(-2.712,4.445) 2(-2.712,3.175) 3(-2.712,1.905) 4(-2.712,0.635) 5(-2.712,-0.635) 6(-2.712,-1.905) 7(-2.712,-3.175) 8(-2.712,-4.445) 9(2.712,-4.445) 10(2.712,-3.175) 11(2.712,-1.905) 12(2.712,-0.635) 13(2.712,0.635) 14(2.712,1.905) 15(2.712,3.175) 16(2.712,4.445)
  silkscreen extent -3.47,-4.95 1.6,5.15, body extent -3,-4.95 3,4.95, height 1.75
SOIC127P600X175-16N [mm]
  rect 1.55x0.65 smd: 1(-2.725,4.445) 2(-2.725,3.175) 3(-2.725,1.905) 4(-2.725,0.635) 5(-2.725,-0.635) 6(-2.725,-1.905) 7(-2.725,-3.175) 8(-2.725,-4.445) 9(2.725,-4.445) 10(2.725,-3.175) 11(2.725,-1.905) 12(2.725,-0.635) 13(2.725,0.635) 14(2.725,1.905) 15(2.725,3.175) 16(2.725,4.445)
  silkscreen extent -3.5,-5.1 1.6,5.12, body extent -3,-5.1 3,5.1, height 1.75
SOIC-8 [mil]
  rect 78x22 smd: 1(-97,75) 2(-97,25) 3(-97,-25) 4(-97,-75) 5(97,-75) 6(97,-25) 7(97,25) 8(97,75)
  silkscreen extent -117,-98 54,101, body extent -116,-96 116,96, height 65
SOIC-16 [mil]
  rect 78x22 smd: 1(-97,175) 2(-97,125) 3(-97,75) 4(-97,25) 5(-97,-25) 6(-97,-75) 7(-97,-125) 8(-97,-175) 9(97,-175) 10(97,-125) 11(97,-75) 12(97,-25) 13(97,25) 14(97,75) 15(97,125) 16(97,175)
  silkscreen extent -117,-197 51,201, body extent -122,-197 122,197, height 69
SOT65P210X110-6N [mm]
  rect 1.2x0.4 smd: 1(-0.95,0.65) 2(-0.95,0) 3(-0.95,-0.65) 4(0.95,-0.65) 5(0.95,0) 6(0.95,0.65)
  silkscreen extent -1.55,1.2 -0.35,1.2, body extent -1.05,-1 1.05,1, height 1
SOT-23 [mil]
  rect 52x22 smd: 1(-40,36) 2(-40,-36) 3(40,0)
  silkscreen extent -9,-59 28,59, body extent -60,-61 58,61, height 57
SOT-223 [mm]
  rect 1.3x0.95 smd: 1(-3.35,2.29) 2(-3.35,0) 3(-3.35,-2.29)
  rect 1.3x3.25 smd: 4(3.35,0)
  silkscreen extent -4,-3.25 1.75,3.25, body extent -3.5,-3.25 3.5,3.25, height 1.8
"YAGEO RES 0603_1608" [mm] "Chip Resistor, 2-Leads, Body 1.60x0.80mm"
  rect 0.9x0.8 smd: 1(-0.85,0) 2(0.85,0)
  silkscreen extent -1.5,-0.6 1.5,0.6, body extent -0.8,-0.4 0.8,0.4, height 0.45

## Part data
C1 C3 C7: library part EMK212B7105KGHTR, "CAP CER 1UF 16V X7R 0805", Capacitance="1 µF", Part Number=EMK212B7105KGHTR
C1_Filters1-2 C1_Filters3-4 C2_Filters1-2 C2_Filters3-4 C27_Filters1-2 C27_Filters3-4 C28_Filters1-2 C28_Filters3-4: library part GRM1885C1H103JA01D, "CAP CER 10000PF 50V C0G/NP0 0603", Device Package="0603 (1608 Metric)", manufacturer="Murata Electronics", Operating Temperature="-55°C ~ 125°C", Supplier Part Number 1=490-9666-1-ND, Temperature Coefficient="C0G, NP0", Tolerance=±5%, Voltage - Rated=50V, Applications="General Purpose", Capacitance="10000 pF", componentlink1description=Datasheet, componentlink1url=https://www.murata.com/~/media/webrenewal/support/library/catalog/products/capacitor/mlcc/c02e.ashx?la=en-us, componentlink2description="DigiKey Link", componentlink2url=https://www.digikey.com/en/products/detail/murata-electronics/GRM1885C1H103JA01D/4421555, lastupdated="7/20/2024 12:23:21 AM", Lifecycle Status=Active, Minimum Order=1, Mounting Type="Surface Mount, MLCC", Package / Case="0603 (1608 Metric)", packaging=TapeAndReel, Part Number=GRM1885C1H103JA01D, Part Status=Active, partid=11077, price=0.02, series=GRM, Size / Dimension="0.063\" L x 0.031\" W (1.60mm x 0.80mm)", Supplier 1=DigiKey, Thickness (Max)="0.035\" (0.90mm)"
C2 C4 C8: library part LMK212ABJ106KD-T, "CAP CER 10UF 10V X5R 0805", Capacitance="10 µF", Part Number=LMK212ABJ106KD-T
C5_Filters1-2 C5_Filters3-4 C6_Filters1-2 C6_Filters3-4 C11_Filters1-2 C11_Filters3-4 C12_Filters1-2 C12_Filters3-4: library part C0805X102J5HACAUTO, "CAP CER 0805 1NF 50V ULTRA STABL", Capacitance="1000 pF", Part Number=C0805X102J5HACAUTO
C9_Filters1-2 C9_Filters3-4 C10_Filters1-2 C10_Filters3-4 C13_Filters1-2 C13_Filters3-4 C14_Filters1-2 C14_Filters3-4 C15_Filters1-2 C15_Filters3-4 C16_Filters1-2 C16_Filters3-4 C17_Filters1-2 C17_Filters3-4 C18_Filters1-2 C18_Filters3-4 C19_Filters1-2 C19_Filters3-4 C20_Filters1-2 C20_Filters3-4 C21_Filters1-2 C21_Filters3-4 C22_Filters1-2 C22_Filters3-4 C23_Filters1-2 C23_Filters3-4 C24_Filters1-2 C24_Filters3-4 C25_Filters1-2 C25_Filters3-4 C26_Filters1-2 C26_Filters3-4: library part C0805C564K5RAC7800, "CAP CER 0.56UF 50V X7R 0805", Capacitance="0.56 µF", Part Number=C0805C564K5RAC7800
IC1: "Integrated Circuit", Manufacturer_Name="Advanced Monolithic Systems", Datasheet Link=http://www.advanced-monolithic.com/pdf/ds1117.pdf, Height=1.8mm, Manufacturer_Part_Number=AMS1117-5.0
IC2: library part AMS1117-5.0, "Integrated Circuit", Manufacturer_Name="Advanced Monolithic Systems", Datasheet Link=http://www.advanced-monolithic.com/pdf/ds1117.pdf, Height=1.8mm, Manufacturer_Part_Number=AMS1117-5.0
IC3: library part 79L06, "Integrated Circuit", Manufacturer_Name=MDD, Datasheet Link=https://datasheet.lcsc.com/szlcsc/1909231507_MDD-Microdiode-Electronics-79L06_C414030.pdf, Height=1.6mm, Manufacturer_Part_Number=79L06
IC4 IC7 IC13 IC14: "Integrated Circuit", Manufacturer_Name="Analog Devices", Manufacturer_Part_Number=DG409MY/PR-T
IC5 IC6: "Integrated Circuit", Arrow Part Number=74HC595D(BJ), Manufacturer_Name=Toshiba, Mouser Part Number=757-74HC595DBJ, Arrow Price/Stock=https://www.arrow.com/en/products/74hc595d-bj/toshiba?region=nac, Datasheet Link=https://componentsearchengine.com/Datasheets/1/74HC595D(BJ).pdf, Height=1.75mm, Manufacturer_Part_Number=74HC595D(BJ), Mouser Price/Stock=https://www.mouser.co.uk/ProductDetail/Toshiba/74HC595DBJ?qs=T%2FywbITssnTkqd02WdSNRg%3D%3D
IC8: "Integrated Circuit", Manufacturer_Name=onsemi, Mouser Part Number=512-CD4051BCM, Datasheet Link=https://media.digikey.com/pdf/Data%20Sheets/Fairchild%20PDFs/CD4051BC.pdf, Height=1.753mm, Manufacturer_Part_Number=CD4051BCM, Mouser Price/Stock=https://www.mouser.com/Search/Refine.aspx?Keyword=512-CD4051BCM
IC9: "Integrated Circuit", Manufacturer_Name="Texas Instruments", Mouser Part Number=595-DAC7311IDCKR, Arrow Part Number=DAC7311IDCKR, Arrow Price/Stock=https://www.arrow.com/en/products/dac7311idckr/texas-instruments?region=nac, Datasheet Link=https://datasheet.lcsc.com/szlcsc/Texas-Instruments-TI-DAC7311IDCKR_C128601.pdf, Height=1.1mm, Manufacturer_Part_Number=DAC7311IDCKR, Mouser Price/Stock=https://www.mouser.co.uk/ProductDetail/Texas-Instruments/DAC7311IDCKR?qs=z3YOdW4mbAwW%2FH6OJTW4CQ%3D%3D
IC10_Filters1-2 IC10_Filters3-4 IC20_Filters1-2 IC20_Filters3-4 IC30_Filters1-2 IC30_Filters3-4: "Integrated Circuit", Arrow Part Number=LM13700N/NOPB, Manufacturer_Name="Texas Instruments", Mouser Part Number=926-LM13700N/NOPB, Arrow Price/Stock=https://www.arrow.com/en/products/lm13700nnopb/texas-instruments?region=nac, Datasheet Link=http://www.ti.com/lit/ds/symlink/lm13700.pdf, Height=4.318mm, Manufacturer_Part_Number=LM13700N/NOPB, Mouser Price/Stock=https://www.mouser.co.uk/ProductDetail/Texas-Instruments/LM13700N-NOPB?qs=X1J7HmVL2ZFKw9D7azZDXw%3D%3D
IC11_Filters1-2 IC11_Filters3-4 IC12_Filters1-2 IC12_Filters3-4 IC15_Filters1-2 IC15_Filters3-4 IC16_Filters1-2 IC16_Filters3-4 IC31_Filters1-2 IC31_Filters3-4 IC32_Filters1-2 IC32_Filters3-4: "Integrated Circuit", Manufacturer_Name="Texas Instruments", Mouser Part Number=595-TL072ACP, Arrow Part Number=TL072ACP, Arrow Price/Stock=https://www.arrow.com/en/products/tl072acp/texas-instruments?utm_currency=USD&region=europe, Datasheet Link=http://www.ti.com/lit/ds/symlink/tl071a.pdf, Height=5.08mm, Manufacturer_Part_Number=TL072ACP, Mouser Price/Stock=https://www.mouser.co.uk/ProductDetail/Texas-Instruments/TL072ACP?qs=0OT4q4QBUTLFvIZ%252B%2FvrwoQ%3D%3D
J1 J2 J6 J8_Filters1-2 J8_Filters3-4 J9_Filters1-2 J9_Filters3-4 J11_Filters1-2 J11_Filters3-4 J12_Filters1-2 J12_Filters3-4 J14 J15 J16 J17 J18 J19 J20 J21: library part Jumper_single, CommentText="\"Перемычка\""
J3 J4 J5 J7: "Connector", Manufacturer_Name=Sullins, Datasheet Link=https://www.sullinscorp.com/drawings/88_LPPB___2NFSS-RC,_11017.pdf, Height=4.65mm, Manufacturer_Part_Number=LPPB042NFSS-RC, System=Connector
J10_Filters1-2 J10_Filters3-4 J13_Filters1-2 J13_Filters3-4: library part LPPB042NFSS-RC, "Connector", Manufacturer_Name=Sullins, Datasheet Link=https://www.sullinscorp.com/drawings/88_LPPB___2NFSS-RC,_11017.pdf, Height=4.65mm, Manufacturer_Part_Number=LPPB042NFSS-RC
Q1_Filters1-2 Q1_Filters3-4 Q2_Filters1-2 Q2_Filters3-4 Q5_Filters1-2 Q5_Filters3-4 Q6_Filters1-2 Q6_Filters3-4: "TRANS NPN 40V 0.2A SOT23-3", Current - Collector (Ic) (Max)="200 mA", Current - Collector Cutoff (Max)="50nA (ICBO)", DC Current Gain (hFE) (Min) @ Ic, Vce="100 @ 10mA, 1V", Frequency - Transition=300MHz, manufacturer="Diodes Incorporated", Operating Temperature="-55°C ~ 150°C (TJ)", Package / Case="TO-236-3, SC-59, SOT-23-3", Power - Max="300 mW", Supplier Device Package=SOT-23-3, Supplier Part Number 1=MMBT3904-FDICT-ND, Voltage - Collector Emitter Breakdown (Max)="40 V", componentlink1description=Datasheet, componentlink1url=https://www.diodes.com/assets/Datasheets/ds30036.pdf, componentlink2description="DigiKey Link", componentlink2url=https://www.digikey.com/en/products/detail/diodes-incorporated/MMBT3904-7-F/814494, lastupdated="2/8/2024 9:54:04 PM", Lifecycle Status=Active, Minimum Order=1, Mounting Type="Surface Mount", packaging=TapeAndReel, Part Number=MMBT3904-7-F, Part Status=Active, partid=85, price=0.01, series=-, Supplier 1=DigiKey, Transistor Type=NPN, Vce Saturation (Max) @ Ib, Ic="300mV @ 5mA, 50mA"
Q3_Filters1-2 Q3_Filters3-4 Q4_Filters1-2 Q4_Filters3-4 Q7_Filters1-2 Q7_Filters3-4 Q8_Filters1-2 Q8_Filters3-4: library part MMBT3906
R1_Filters1-2 R1_Filters3-4 R3_Filters1-2 R3_Filters3-4 R12_Filters1-2 R12_Filters3-4 R14_Filters1-2 R14_Filters3-4 R17_Filters1-2 R17_Filters3-4 R19_Filters1-2 R19_Filters3-4 R21 R22 R30_Filters1-2 R30_Filters3-4 R32_Filters1-2 R32_Filters3-4 R33 R34 R35 R36 R37 R38 R39 R40 R41: library part CRCW0603220RFKEA, "RES SMD 220 OHM 1% 1/10W 0603", Part Number=CRCW0603220RFKEA
R2_Filters1-2 R2_Filters3-4 R10_Filters1-2 R10_Filters3-4 R11_Filters1-2 R11_Filters3-4 R20_Filters1-2 R20_Filters3-4 R23_Filters1-2 R23_Filters3-4 R31_Filters1-2 R31_Filters3-4: library part CPF0603F100KC1, "RES SMD 100K OHM 1% 1/16W 0603", Part Number=CPF0603F100KC1
R4_Filters1-2 R4_Filters3-4 R7_Filters1-2 R7_Filters3-4 R8_Filters1-2 R8_Filters3-4 R9_Filters1-2 R9_Filters3-4 R13_Filters1-2 R13_Filters3-4 R15_Filters1-2 R15_Filters3-4 R16_Filters1-2 R16_Filters3-4 R18_Filters1-2 R18_Filters3-4 R24_Filters1-2 R24_Filters3-4 R25_Filters1-2 R25_Filters3-4 R26_Filters1-2 R26_Filters3-4 R29_Filters1-2 R29_Filters3-4: library part CRCW060310K0FKEA, "RES SMD 10K OHM 1% 1/10W 0603", Part Number=CRCW060310K0FKEA
R5_Filters1-2 R5_Filters3-4 R6_Filters1-2 R6_Filters3-4 R27_Filters1-2 R27_Filters3-4 R28_Filters1-2 R28_Filters3-4: library part CRCW060347K0FKEAHP, "RES SMD 47K OHM 1% 1/3W 0603", Part Number=CRCW060347K0FKEAHP
R42_Filters1-2 R42_Filters3-4 R44_Filters1-2 R44_Filters3-4 R52_Filters1-2 R52_Filters3-4 R54_Filters1-2 R54_Filters3-4: library part AC0603FR-0733KL, "RES SMD 33K OHM 1% 1/10W 0603", Device Package="0603 (1608 Metric)", manufacturer=Yageo, Operating Temperature="-55°C ~ 155°C", Power (Watts)="0.1W, 1/10W", Ratings=AEC-Q200, Supplier Device Package=0603, Supplier Part Number 1=YAG3598CT-ND, Temperature Coefficient=±100ppm/°C, Tolerance=±1%, componentlink1description=Datasheet, componentlink1url=https://www.yageo.com/upload/media/product/productsearch/datasheet/rchip/PYu-AC_51_RoHS_L_7.pdf, componentlink2description="DigiKey Link", componentlink2url=https://www.digikey.com/en/products/detail/yageo/AC0603FR-0733KL/5896041, Composition="Thick Film", Features="Automotive AEC-Q200, Moisture Resistant", Height - Seated (Max)="0.022\" (0.55mm)", lastupdated="7/25/2024 9:19:23 AM", Lifecycle Status=Active, Minimum Order=1, Number of Terminations=2, Package / Case="0603 (1608 Metric)", packaging=CutTape, Part Number=AC0603FR-0733KL, Part Status=Active, partid=17385, price=0.01, Resistance="33 kOhms", series=AC, Size / Dimension="0.063\" L x 0.031\" W (1.60mm x 0.80mm)", Supplier 1=DigiKey
R43_Filters1-2 R43_Filters3-4 R45_Filters1-2 R45_Filters3-4 R53_Filters1-2 R53_Filters3-4 R55_Filters1-2 R55_Filters3-4: library part AA0603FR-071KL, "RES SMD 1K OHM 1% 1/10W 0603", Device Package="0603 (1608 Metric)", manufacturer=Yageo, Operating Temperature="-55°C ~ 155°C", Power (Watts)="0.1W, 1/10W", Ratings=AEC-Q200, Supplier Device Package=0603, Supplier Part Number 1=13-AA0603FR-071KLCT-ND, Temperature Coefficient=±150ppm/°C, Tolerance=±1%, componentlink1description=Datasheet, componentlink1url=https://www.yageo.com/upload/media/product/productsearch/datasheet/rchip/PYu-AA_51_RoHS_L_3.pdf, componentlink2description="DigiKey Link", componentlink2url=https://www.digikey.com/en/products/detail/yageo/AA0603FR-071KL/5888847, Composition="Thick Film", Features="Anti-Sulfur, Automotive AEC-Q200, Moisture Resistant", Height - Seated (Max)="0.022\" (0.55mm)", lastupdated="7/25/2024 9:19:15 AM", Lifecycle Status=Active, Minimum Order=1, Number of Terminations=2, Package / Case="0603 (1608 Metric)", packaging=TapeAndReel, Part Number=AA0603FR-071KL, Part Status=Active, partid=64335, price=0.01, Resistance="1 kOhms", series=AA, Size / Dimension="0.063\" L x 0.031\" W (1.60mm x 0.80mm)", Supplier 1=DigiKey
R46_Filters1-2 R46_Filters3-4 R56_Filters1-2 R56_Filters3-4 R57_Filters1-2 R57_Filters3-4 R63_Filters1-2 R63_Filters3-4: library part AC0603FR-07120KL, "RES SMD 120K OHM 1% 1/10W 0603", Device Package="0603 (1608 Metric)", manufacturer=Yageo, Operating Temperature="-55°C ~ 155°C", Power (Watts)="0.1W, 1/10W", Ratings=AEC-Q200, Supplier Device Package=0603, Supplier Part Number 1=YAG3562CT-ND, Temperature Coefficient=±100ppm/°C, Tolerance=±1%, componentlink1description=Datasheet, componentlink1url=https://www.yageo.com/upload/media/product/productsearch/datasheet/rchip/PYu-AC_51_RoHS_L_7.pdf, componentlink2description="DigiKey Link", componentlink2url=https://www.digikey.com/en/products/detail/yageo/AC0603FR-07120KL/5895760, Composition="Thick Film", Features="Automotive AEC-Q200, Moisture Resistant", Height - Seated (Max)="0.022\" (0.55mm)", lastupdated="7/25/2024 9:19:23 AM", Lifecycle Status=Active, Minimum Order=1, Number of Terminations=2, Package / Case="0603 (1608 Metric)", packaging=CutTape, Part Number=AC0603FR-07120KL, Part Status=Active, partid=17461, price=0.01, Resistance="120 kOhms", series=AC, Size / Dimension="0.063\" L x 0.031\" W (1.60mm x 0.80mm)", Supplier 1=DigiKey
R47_Filters1-2 R47_Filters3-4 R48_Filters1-2 R48_Filters3-4 R58_Filters1-2 R58_Filters3-4 R59_Filters1-2 R59_Filters3-4: library part AC0603FR-07330KL, "RES SMD 330K OHM 1% 1/10W 0603", Device Package="0603 (1608 Metric)", manufacturer=Yageo, Operating Temperature="-55°C ~ 155°C", Power (Watts)="0.1W, 1/10W", Ratings=AEC-Q200, Supplier Device Package=0603, Supplier Part Number 1=YAG3594CT-ND, Temperature Coefficient=±100ppm/°C, Tolerance=±1%, componentlink1description=Datasheet, componentlink1url=https://www.yageo.com/upload/media/product/productsearch/datasheet/rchip/PYu-AC_51_RoHS_L_7.pdf, componentlink2description="DigiKey Link", componentlink2url=https://www.digikey.com/en/products/detail/yageo/AC0603FR-07330KL/5896036, Composition="Thick Film", Features="Automotive AEC-Q200, Moisture Resistant", Height - Seated (Max)="0.022\" (0.55mm)", lastupdated="7/25/2024 9:19:23 AM", Lifecycle Status=Active, Minimum Order=1, Number of Terminations=2, Package / Case="0603 (1608 Metric)", packaging=CutTape, Part Number=AC0603FR-07330KL, Part Status=Active, partid=17469, price=0.01, Resistance="330 kOhms", series=AC, Size / Dimension="0.063\" L x 0.031\" W (1.60mm x 0.80mm)", Supplier 1=DigiKey